# Altium PCB licheepi_nano_pcb.PcbDoc
Units mil, origin at the board's own origin, x right, y up, seen from the top; angles counter-clockwise.
Board outline 1096.8 x 1363.5 mil, 4 copper layers (Top Layer, Layer 1, Layer 2, Bottom Layer), stack 23.756 mil thick; 76 components, 94 nets, 415 pads, 227 vias.
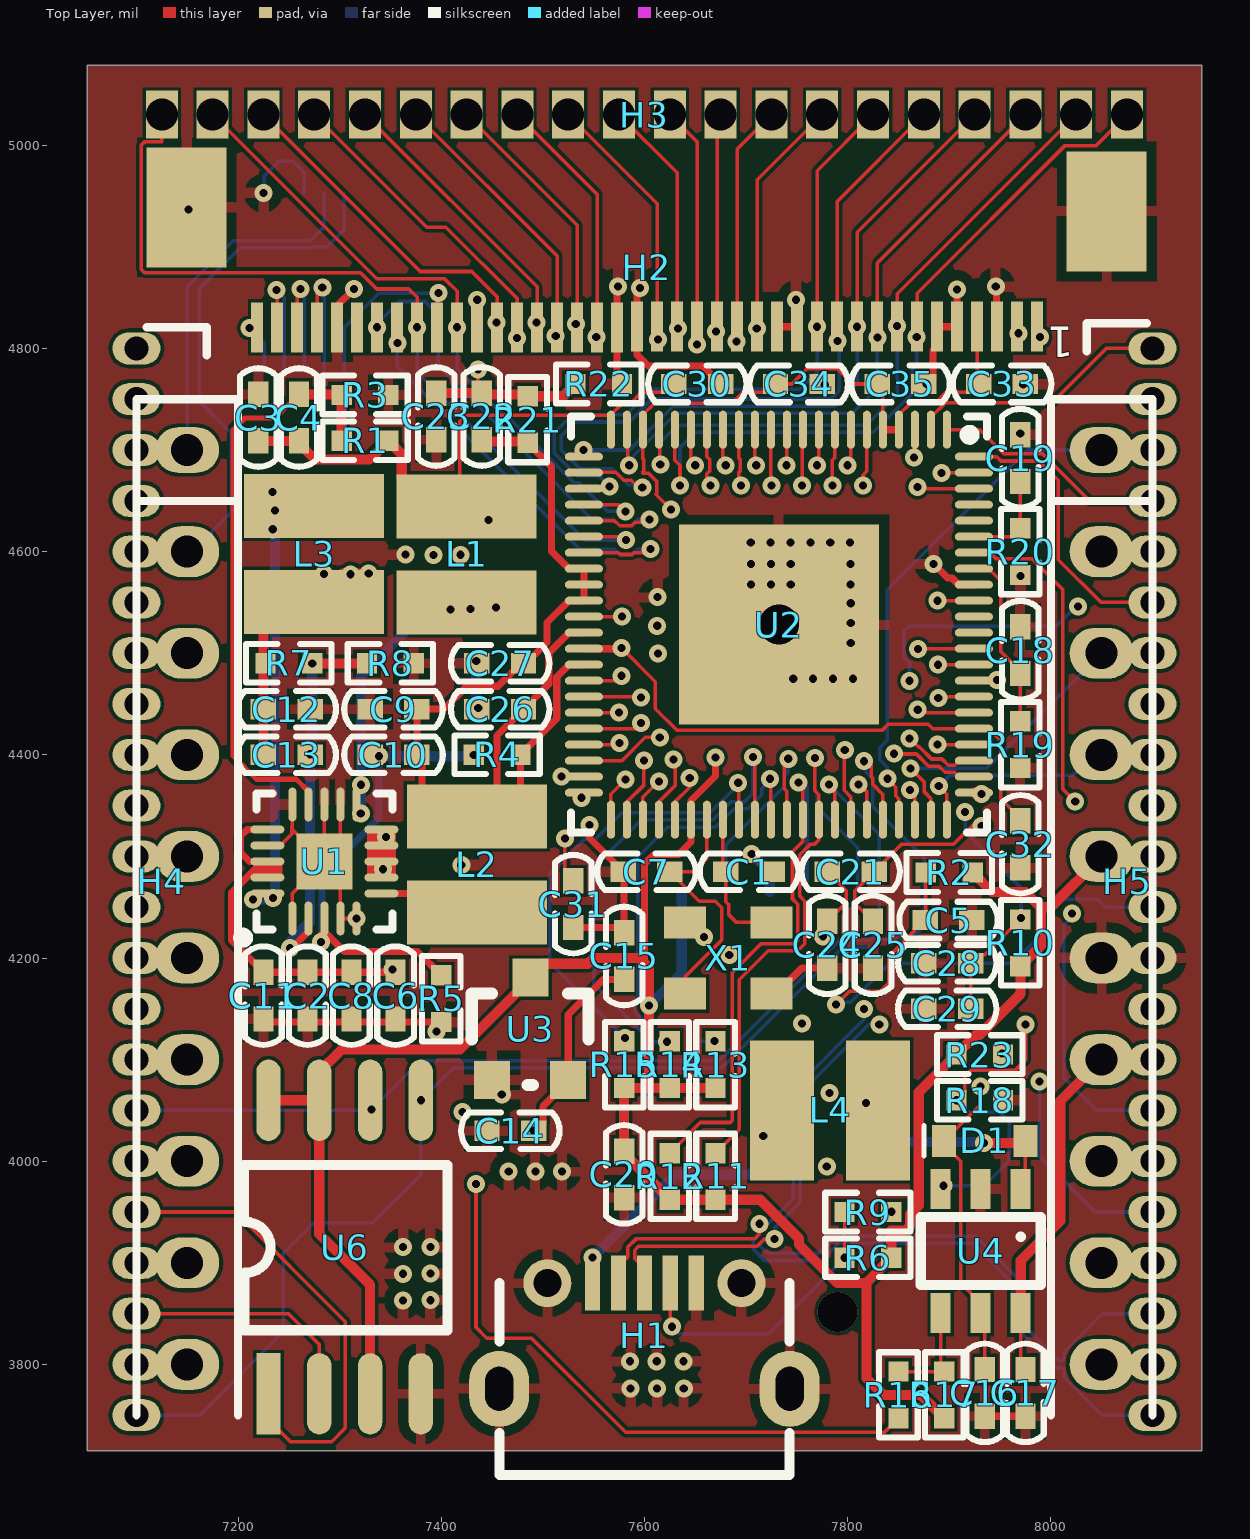
[diagram p0: Top Layer view]
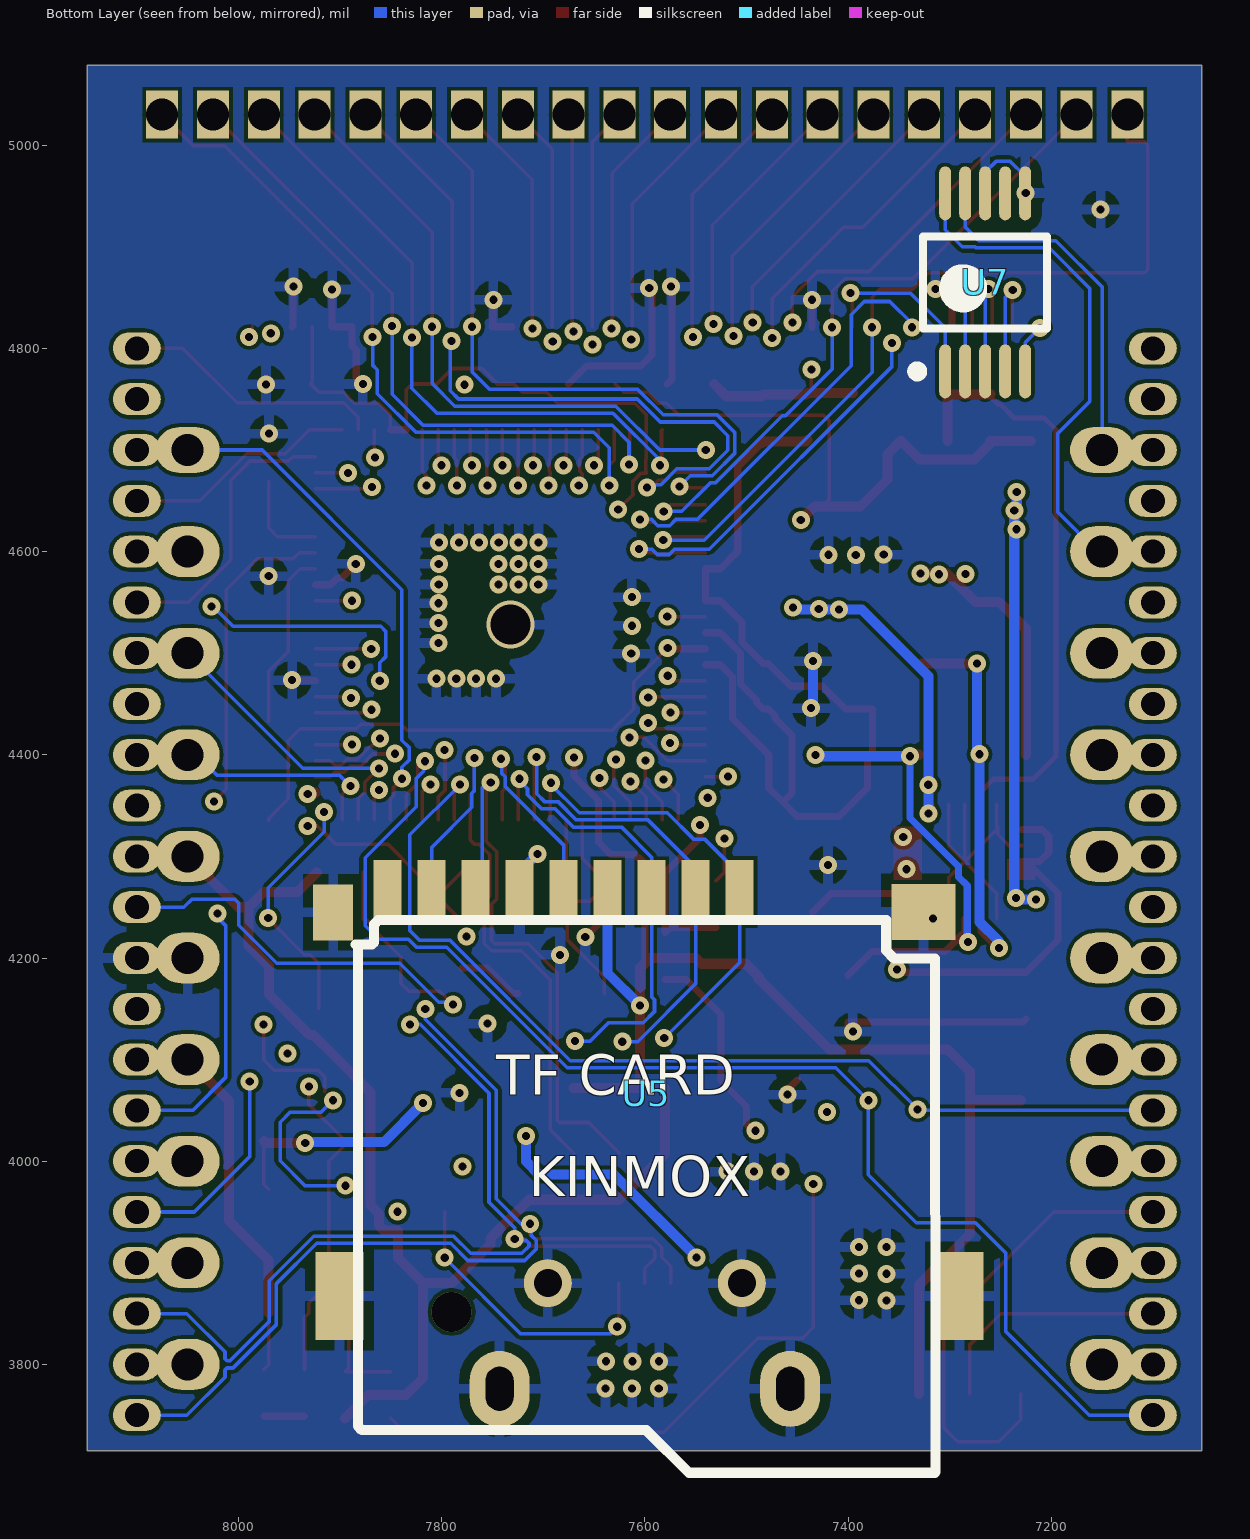
[diagram p1: Bottom Layer view, seen from below]
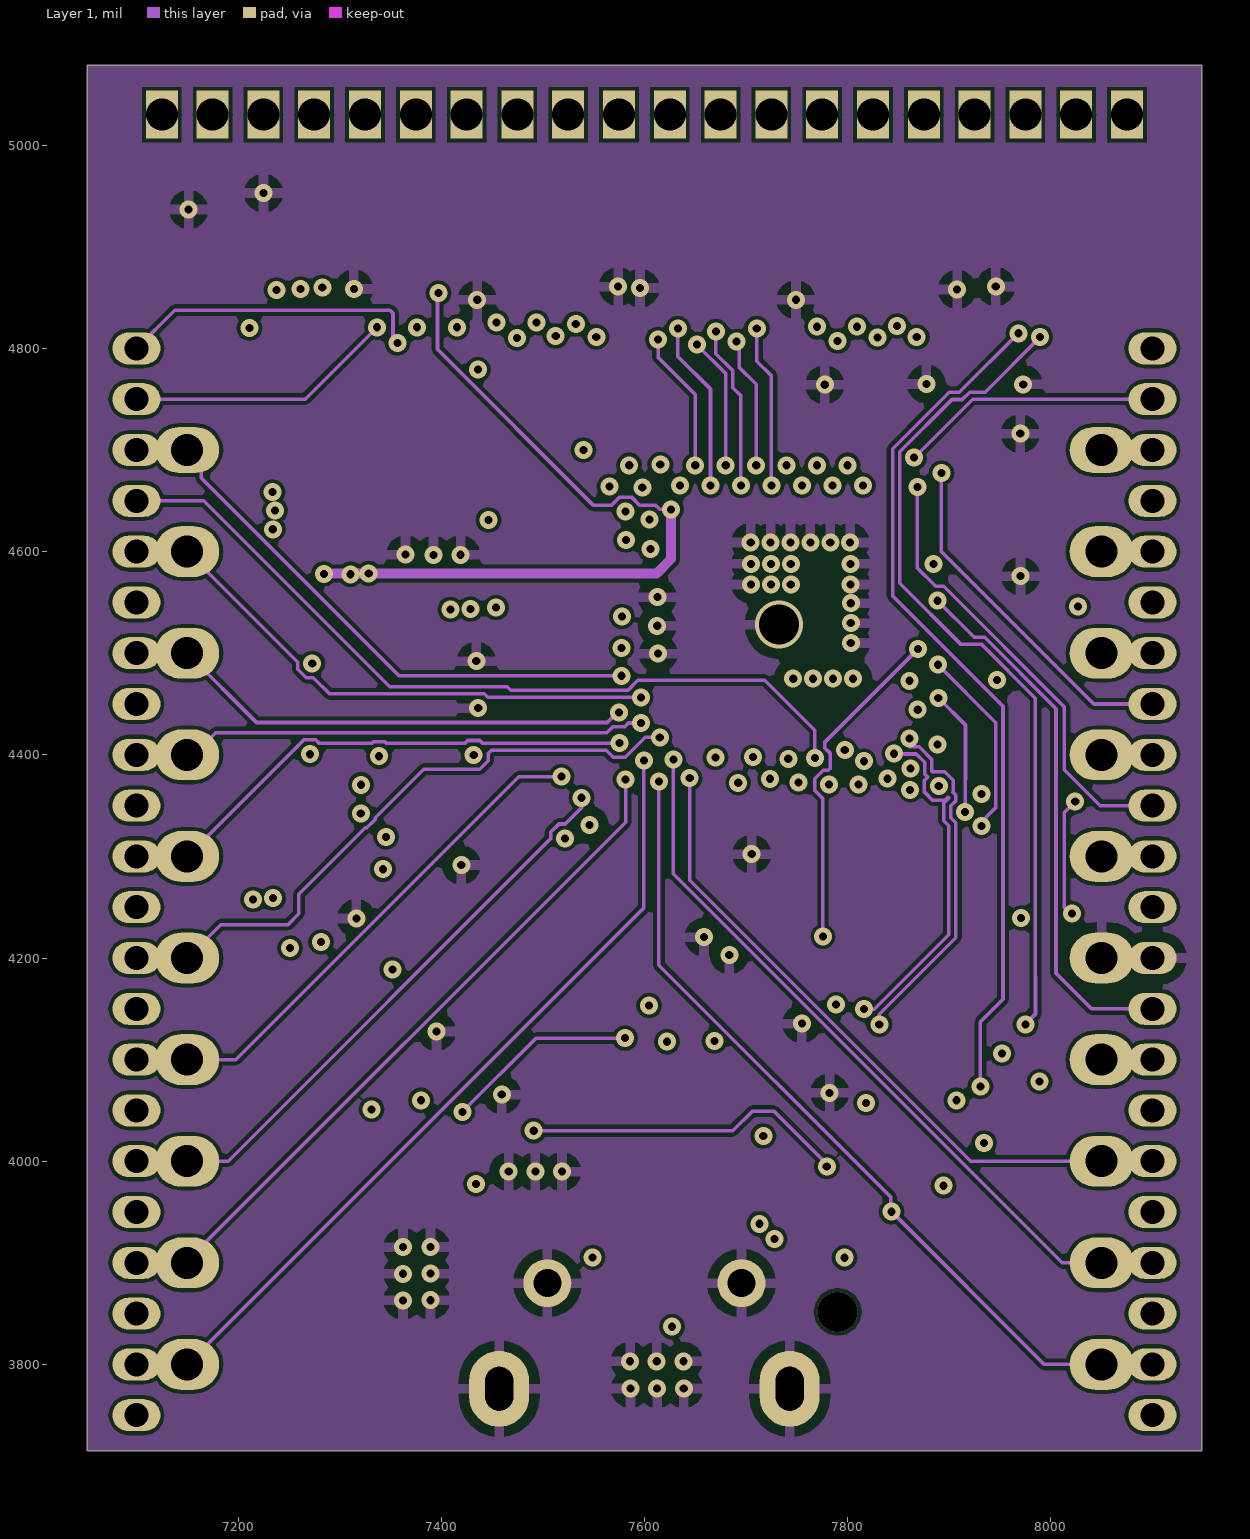
[diagram p2: Layer 1]
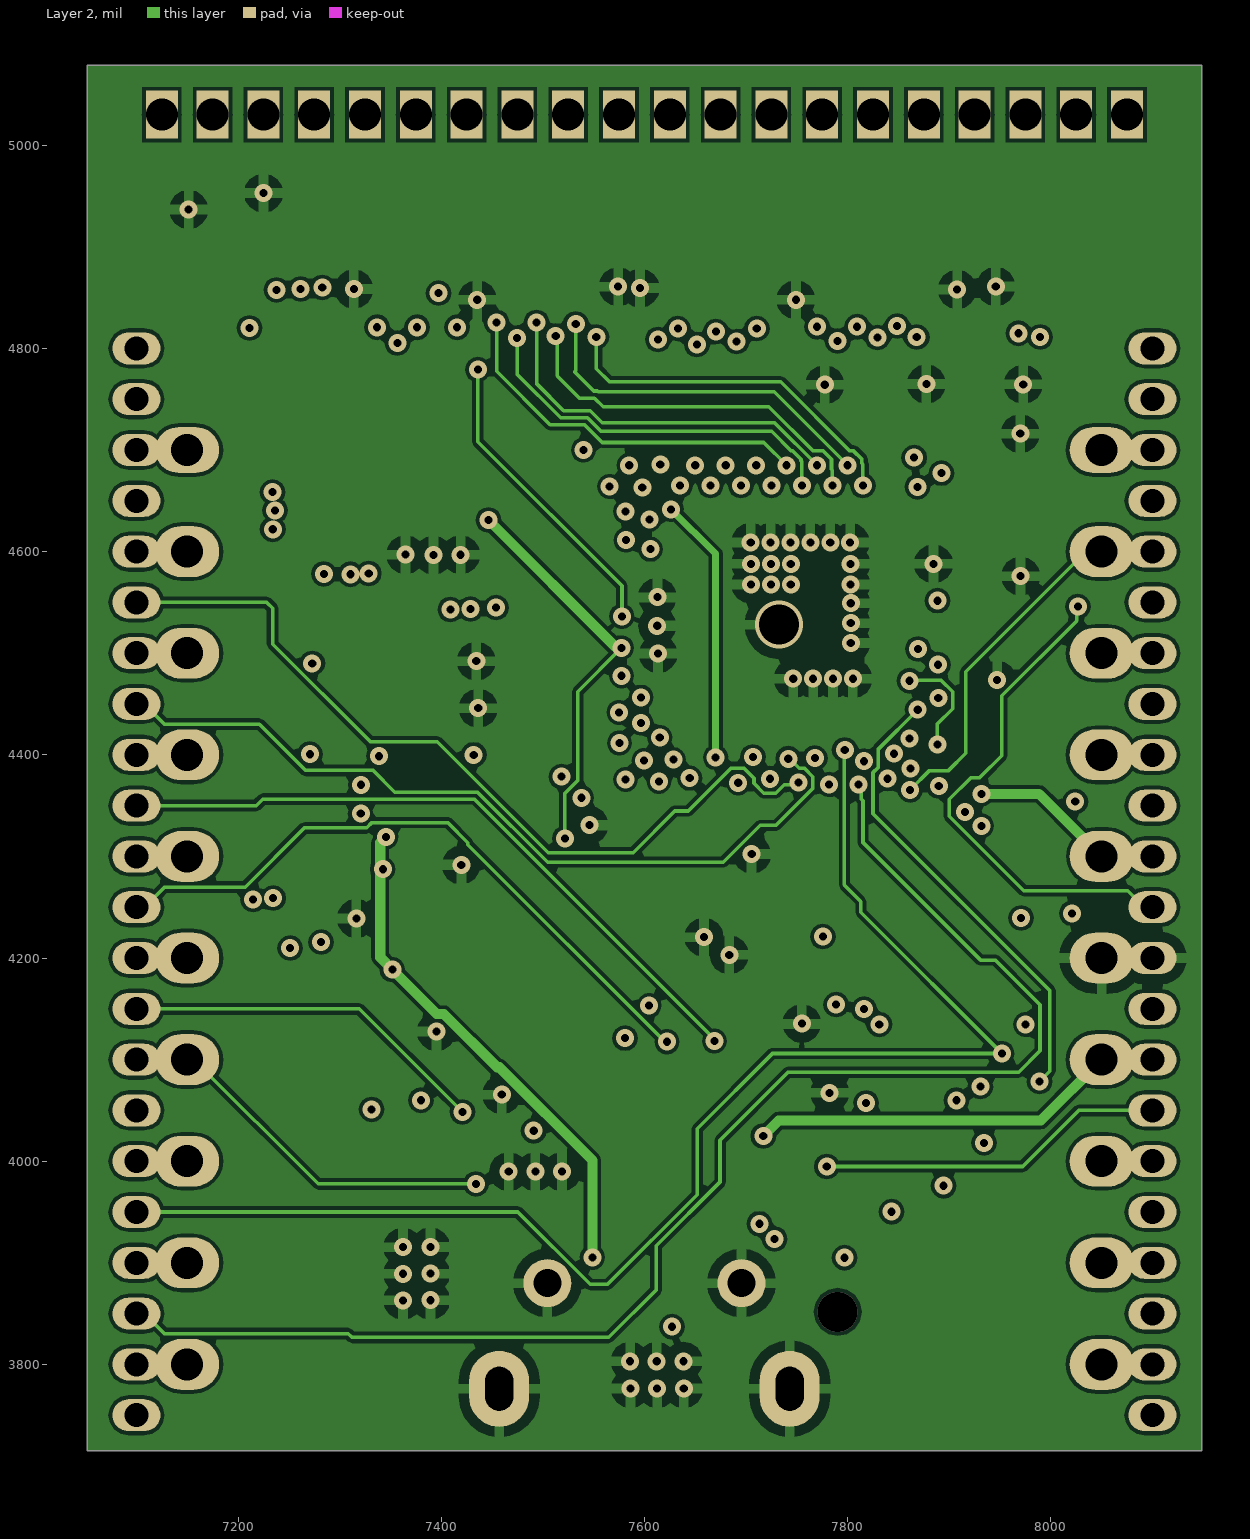
[diagram p3: Layer 2]
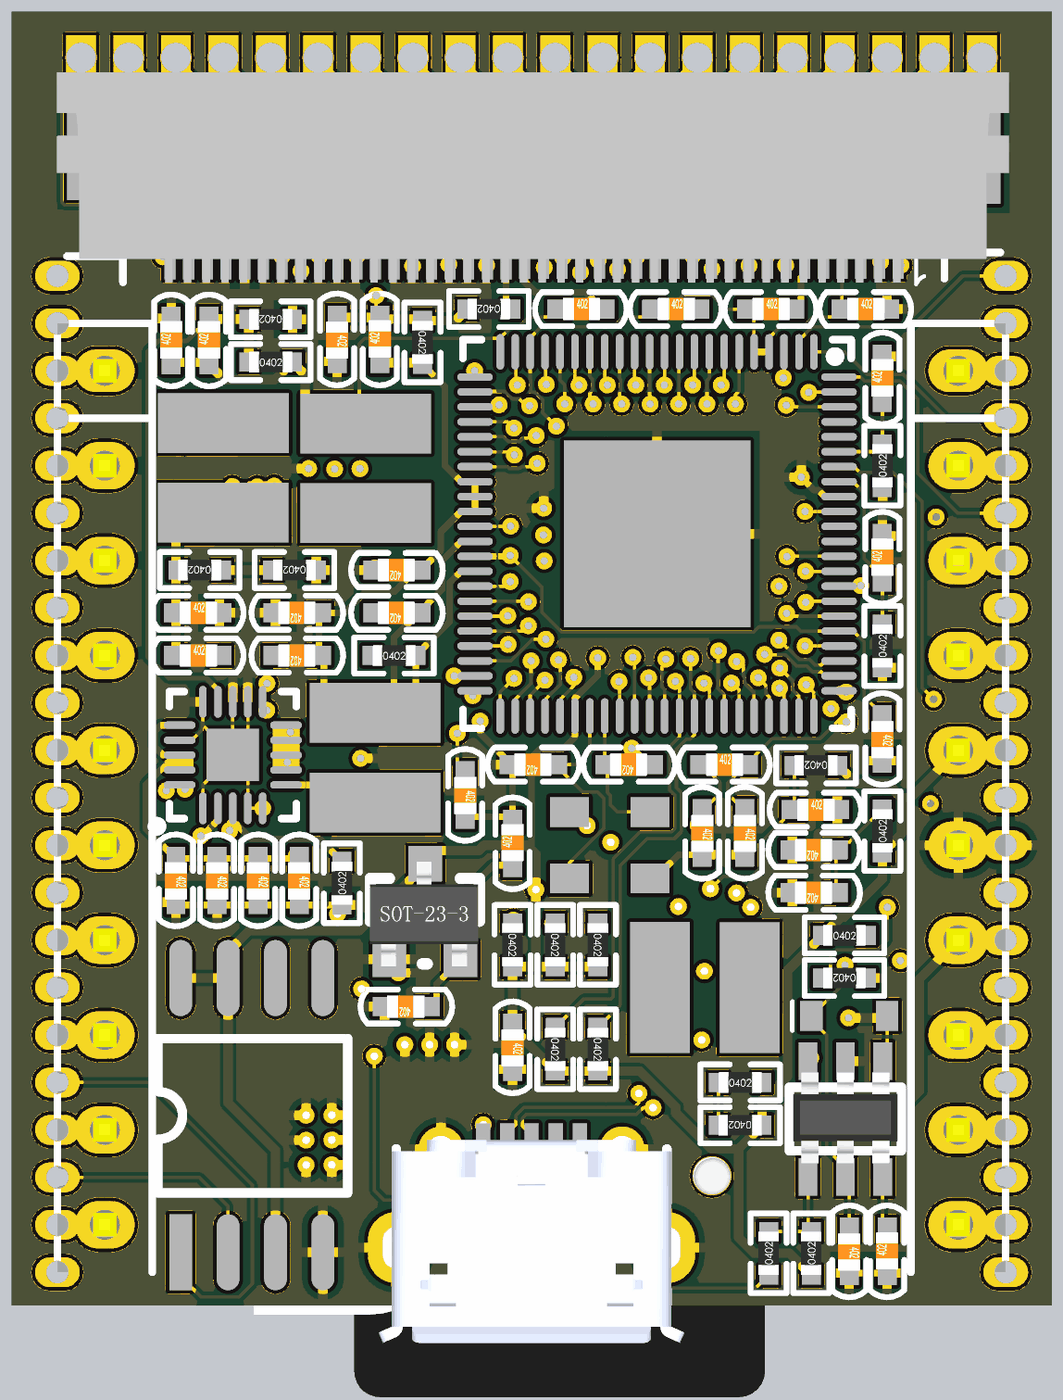
[diagram p4: 3D render of the assembled board from above, using the file's embedded part models]

## Layer stack, top to bottom
Top Solder: solder mask 0.4, Solder Resist, Dk 3.5
Top Layer: signal copper 1.4
Dielectric 2: prepreg 2.8, PP-006, Dk 4.1
Layer 1: signal copper 1.3779
Dielectric 1: dielectric 12.6, FR-4, Dk 4.8
Layer 2: signal copper 1.3779
Dielectric 3: prepreg 2.8, PP-006, Dk 4.1
Bottom Layer: signal copper 1.4
Bottom Solder: solder mask 0.4, Solder Resist, Dk 3.5

## Board outline
7051.8,3715 8148.6,3715 8148.6,5078.5 7051.8,5078.5

## Design rules (kind name [scope] priority, off if disabled: settings)
Clearance [All] p1: gap=3.5 ignorepadtopadclearanceinfootprint=FALSE except(0: Arc-Hole Track-Hole SMDPad-Hole THPad-Hole Via-Hole Fill-Hole Poly-Hole Region-Hole Text-Hole)
DiffPairsRouting [All] p1: maxlimit=10 minlimit=3.5 mostfreqgap=3.5 toplayer_maxgap=3.5 toplayer_minwidth=3.5 toplayer_maxwidth=3.5 toplayer_prefwidth=3.5 midlayer1_maxgap=3.5 midlayer1_minwidth=3.5 midlayer1_maxwidth=3.5 midlayer1_prefwidth=3.5 midlayer2_minwidth=3.5 midlayer2_maxwidth=3.5 midlayer2_prefwidth=3.5 bottomlayer_minwidth=3.5 bottomlayer_maxwidth=3.5 bottomlayer_prefwidth=3.5 maxuncoupledlength=500
MinimumSolderMaskSliver [All] p1 off: minsoldermaskwidth=10
PolygonConnect [All] p1: connectstyle=Relief reliefconductorwidth=10 reliefentries=4 polygonreliefangle="90 Angle" airgapwidth=10
RoomDefinition licheepi_nano_pcb [InComponentClass('licheepi_nano_pcb')] p1 off: confinementstyle=ConfineIn formatcopy=TRUE lockcomponents=FALSE outline 7465,3445 23305,3445 23305,2265 7465,2265
RoutingVias [All] p1: holewidth=7.99 width=17.72 viastyle="Through Hole" minholewidth=7.99 minwidth=17.72 maxholewidth=7.99 maxwidth=17.72
SilkToSilkClearance [All] p1 off: silktosilkclearance=10
SilkToSolderMaskClearance [IsPad] p1 off: minsilkscreentomaskgap=10 clearancetoexposedcopper=TRUE
SolderMaskExpansion [All] p1: expansion=4
Width [All] p1: maxlimit=10 minlimit=3.5 preferedwidth=3.5
26 further rules are at their usual default settings.

## Components (designator, comment, footprint, x,y, rotation, side; value= is the part's Value field where it differs from the comment)
C1 "18pF" 0402C 7726,4285 r180 top
C2 "10uF" 0402C 7268.33,4186 r270 top
C3 "10uF" 0402C 7220,4709 r90 top
C4 "18pF" 0402C 7260,4709 r90 top
C5 "0.1uF" 0402C 7876.32,4237.37 r0 top
C6 "10uF" 0402C 7355,4186 r270 top
C7 "18pF" 0402C 7625,4285 r180 top
C8 "10uF" 0402C 7311.67,4186 r270 top
C9 "10uF" 0402C 7376,4445 r180 top
C10 "18pF" 0402C 7376,4400 r180 top
C11 "1uF" 0402C 7225,4186 r270 top
C12 "10uF" 0402C 7225,4445 r0 top
C13 "18pF" 0402C 7225,4400 r0 top
C14 "0.1uF" 0402C 7491,4030 r180 top
C15 "10uF" 0402C 7580,4179 r90 top
C16 "0.1uF_25V" 0402C 7935,3795 r270 top
C17 "10uF" 0402C 7975,3749 r90 top
C18 "1uF" 0402C 7970,4480 r90 top
C19 "1uF" 0402C 7970,4669 r90 top
C20 "0.1uF" 0402C 7580,4010 r270 top
C21 "10uF" 0402C 7780,4285 r0 top
C22 "0.1uF" 0402C 7440,4710 r90 top
C23 "0.1uF" 0402C 7395,4756 r270 top
C24 "10uF" 0402C 7780,4236 r270 top
C25 "10uF" 0402C 7825,4236 r270 top
C26 "1uF" 0402C 7481,4445 r180 top
C27 "0.1uF" 0402C 7481,4490 r180 top
C28 "10uF" 0402C 7921,4195 r180 top
C29 "0.1uF" 0402C 7921,4150 r180 top
C30 "0.1uF" 0402C 7629,4765 r0 top
C31 "0.1uF" 0402C 7530,4276 r270 top
C32 "0.1uF" 0402C 7970,4335 r270 top
C33 "10uF" 0402C 7929,4765 r0 top
C34 "0.1uF" 0402C 7729,4765 r0 top
C35 "0.1uF" 0402C 7829,4765 r0 top
D1 "1N5819" SOD123 7975,4020 r180 top
H1 "USB_MICRO" USB_MICRO_insert 7600,3880 r180 top
H2 "FPC-40-LCD" FPC-40P-0.5 8086.5,4911.38 r180 top
H3 "HEADER_TOP" SIP20_1.27_half 8075,5030 r180 top
H4 "HEADER_LEFT" SIP22_10_1.27-mir 7100,4750 r270 top
H5 "HEADER_RIGHT" SIP22_10_1.27 8100,4750 r270 top
L1 "2.2uH" CD32 7425,4615 r180 top
L2 "2.2uH" CD32 7435,4310 r180 top
L3 "2.2uH" CD32 7275,4580 r0 top
L4 "2.2uH" CD32 7765,4050 r270 top
R1 "150K" 0402R 7325,4709.17 r0 top
R2 "47K" 0402R 7900,4284.18 r180 top
R3 "150K" 0402R 7325,4754.17 r180 top
R4 "470K" 0402R 7455,4400 r0 top
R5 "160K" 0402R 7400,4160 r90 top
R6 "47K" 0402R 7820,3905 r180 top
R7 "680K" 0402R 7250,4490 r180 top
R8 "150K" 0402R 7350,4490 r180 top
R9 "0R" 0402R 7820,3950 r0 top
R10 "0R" 0402R 7970,4215 r90 top
R11 "47K" 0402R 7670,3985 r270 top
R12 "47K" 0402R 7625,3985 r270 top
R13 "47K" 0402R 7670,4095 r270 top
R14 "47K" 0402R 7625,4095 r270 top
R15 "47K" 0402R 7580,4095 r270 top
R16 "0R" 0402R 7850,3770 r90 top
R17 "10K" 0402R 7895,3770 r90 top
R18 "5R1" 0402R 7930,4060 r180 top
R19 "200K" 0402R 7970,4410 r90 top
R20 "200K" 0402R 7970,4600 r90 top
R21 "2K" 0402R 7485,4730 r270 top
R22 "2K" 0402R 7555,4765 r180 top
R23 "10K" 0402R 7930,4105 r0 top
U1 "EA3036" QFN20-3x3 7285,4295 r90 top
U2 "F1C100S" QFN88-0.4 7732.36,4528.07 r270 top
U3 "XC6206" SOT-23 7450,4080 r0 top
U4 "PT4103" sot23_6 7990,3945 r180 top
U5 "TF_Slot" TF_self-eject 7506.77,4265 r180 bottom
U6 "FLASH_W25Q128" SO-8M 7230,3759.21 r90 top
U7 "NS2009" MSOP10 7265,4865 r90 bottom
X1 "XTAL_24M_3225" SMD_3225 7640,4165 r0 top

## Footprints (in the part's own frame and the unit in brackets; to place one, negate y for a bottom-side part, rotate by r counter-clockwise, add the part's x,y. Pads: shape width x height; smd on the part's side, far side on the other; paste and mask are expansions set on the pad)
0402C [mil]
  rect 25x20 smd: 1(0,0) 2(46,0)
  silkscreen extent -25,-18 71,18, body extent 4,-12 43,12, height 8
0402R [mil]
  rect 20x20 smd: 1(-23,0) 2(23,0)
  silkscreen extent -42,-19 42,19, body extent -23,-11 23,11, height 16
CD32 [mm]
  rect 3.5x1.6 smd: 1(0,1.651) 2(-0.002,-0.748)
FPC-40P-0.5 [mm]
  rect 0.3x1.25 smd: 1(2.54,2.286) 2(3.04,2.286) 3(3.54,2.286) 4(4.04,2.286) 5(4.54,2.286) 6(5.04,2.286) 7(5.54,2.286) 8(6.04,2.286) 9(6.54,2.286) 10(7.04,2.286) 11(7.54,2.286) 12(8.04,2.286) 13(8.54,2.286) 14(9.04,2.286) 15(9.54,2.286) 16(10.04,2.286) 17(10.54,2.286) 18(11.04,2.286) 19(11.54,2.286) 20(12.04,2.286) 21(12.54,2.286) 22(13.04,2.3) 23(13.54,2.3) 24(14.04,2.3) 25(14.54,2.3) 26(15.04,2.3) 27(15.54,2.3) 28(16.04,2.3) 29(16.54,2.3) 30(17.04,2.3) 31(17.54,2.3) 32(18.04,2.3) 33(18.54,2.3) 34(19.04,2.3) 35(19.54,2.3) 36(20.04,2.3) 37(20.54,2.3) 38(21.04,2.3) 39(21.54,2.3) 40(22.04,2.3)
  rect 2x3 smd: 41(0.8,-0.6) 42(23.8,-0.7)
  silkscreen extent -0.2,2.2 24.8,3, body extent -0.43,-2.63 25.07,3.01, height 2.21
MSOP10 [mm] "TSSOP, 10-Leads, Body 3.00x3.00mm, Pitch 0.50mm, IPC Medium Density"
  oval 1.35x0.3 smd: 1(-2.225,1) 2(-2.225,0.5) 3(-2.225,0) 4(-2.225,-0.5) 5(-2.225,-1) 6(2.225,-1) 7(2.225,-0.5) 8(2.225,0) 9(2.225,0.5) 10(2.225,1)
  silkscreen extent -2.35,-1.55 1.15,1.83, body extent -1.55,-1.55 1.55,1.55, height 1.12
QFN20-3x3 [mm] "QFN, 20-Leads, Body 3.00x3.00mm, Pitch 0.40mm"
  oval 0.85x0.2 smd: 1(-1.425,0.8) 2(-1.425,0.4) 3(-1.425,0) 4(-1.425,-0.4) 5(-1.425,-0.8) 11(1.425,-0.8) 12(1.425,-0.4) 13(1.425,0) 14(1.425,0.4) 15(1.425,0.8)
  oval 0.2x0.85 smd: 6(-0.8,-1.425) 7(-0.4,-1.425) 8(0,-1.425) 9(0.4,-1.425) 10(0.8,-1.425) 16(0.8,1.425) 17(0.4,1.425) 18(0,1.425) 19(-0.4,1.425) 20(-0.8,1.425)
  rect 1.4x1.4 smd: 21(0,0)
  silkscreen extent -2.03,-1.7 1.7,2.16, body extent -1.55,-1.55 1.55,1.55, height 0.8
QFN88-0.4 [mm] "QFN88-0.4"
  oval 0.95x0.2 smd: 1(-4.875,4.2) 2(-4.875,3.8) 3(-4.875,3.4) 4(-4.875,3) 5(-4.875,2.6) 6(-4.875,2.2) 7(-4.875,1.8) 8(-4.875,1.4) 9(-4.875,1) 10(-4.875,0.6) 11(-4.875,0.2) 12(-4.875,-0.2) 13(-4.875,-0.6) 14(-4.875,-1) 15(-4.875,-1.4) 16(-4.875,-1.8) 17(-4.875,-2.2) 18(-4.875,-2.6) 19(-4.875,-3) 20(-4.875,-3.4) 21(-4.875,-3.8) 22(-4.875,-4.2) 45(4.875,-4.2) 46(4.875,-3.8) 47(4.875,-3.4) 48(4.875,-3) 49(4.875,-2.6) 50(4.875,-2.2) 51(4.875,-1.8) 52(4.875,-1.4) 53(4.875,-1) 54(4.875,-0.6) 55(4.875,-0.2) 56(4.875,0.2) 57(4.875,0.6) 58(4.875,1) 59(4.875,1.4) 60(4.875,1.8) 61(4.875,2.2) 62(4.875,2.6) 63(4.875,3) 64(4.875,3.4) 65(4.875,3.8) 66(4.875,4.2)
  oval 0.2x0.95 smd: 23(-4.2,-4.875) 24(-3.8,-4.875) 25(-3.4,-4.875) 26(-3,-4.875) 27(-2.6,-4.875) 28(-2.2,-4.875) 29(-1.8,-4.875) 30(-1.4,-4.875) 31(-1,-4.875) 32(-0.6,-4.875) 33(-0.2,-4.875) 34(0.2,-4.875) 35(0.6,-4.875) 36(1,-4.875) 37(1.4,-4.875) 38(1.8,-4.875) 39(2.2,-4.875) 40(2.6,-4.875) 41(3,-4.875) 42(3.4,-4.875) 43(3.8,-4.875) 44(4.2,-4.875) 67(4.2,4.875) 68(3.8,4.875) 69(3.4,4.875) 70(3,4.875) 71(2.6,4.875) 72(2.2,4.875) 73(1.8,4.875) 74(1.4,4.875) 75(1,4.875) 76(0.6,4.875) 77(0.2,4.875) 78(-0.2,4.875) 79(-0.6,4.875) 80(-1,4.875) 81(-1.4,4.875) 82(-1.8,4.875) 83(-2.2,4.875) 84(-2.6,4.875) 85(-3,4.875) 86(-3.4,4.875) 87(-3.8,4.875) 88(-4.2,4.875)
  rect 5x5 smd: 89(0,0)
  silkscreen extent -5.2,-5.2 5.2,5.2, body extent -5.05,-5.05 5.05,5.05, height 0.9
SIP20_1.27_half [mm]
  rect 0.8x1.2 hole 0.8: 1(0,0) 2(1.27,0) 3(2.54,0) 4(3.81,0) 5(5.08,0) 6(6.35,0) 7(7.62,0) 8(8.89,0) 9(10.16,0) 10(11.43,0) 11(12.7,0) 12(13.97,0) 13(15.24,0) 14(16.51,0) 15(17.78,0) 16(19.05,0) 17(20.32,0) 18(21.59,0) 19(22.86,0) 20(24.13,0)
SIP22_10_1.27 [mm]
  oval 0.8x1.2 hole 0.6: 1(-1.27,0) 2(0,0) 3(1.27,0) 4(2.54,0) 5(3.81,0) 6(5.08,0) 7(6.35,0) 8(7.62,0) 9(8.89,0) 10(10.16,0) 11(11.43,0) 12(12.7,0) 13(13.97,0) 14(15.24,0) 15(16.51,0) 16(17.78,0) 17(19.05,0) 18(20.32,0) 19(21.59,0) 20(22.86,0) 21(24.13,0) 22(25.4,0)
  oval 1.143x1.6 hole 0.8: 3(1.27,-1.27)
  oval 1.27x1.6 hole 0.8: 5(3.81,-1.27) 7(6.35,-1.27) 9(8.89,-1.27) 11(11.43,-1.27) 13(13.97,-1.27) 15(16.51,-1.27) 17(19.05,-1.27) 19(21.59,-1.27) 21(24.13,-1.27)
  silkscreen extent 0,-2.54 25.4,0, body extent 0,-2.54 25.4,0, height 8.89
SIP22_10_1.27-mir [mm]
  oval 0.8x1.2 hole 0.6: 1(-1.27,0) 2(0,0) 3(1.27,0) 4(2.54,0) 5(3.81,0) 6(5.08,0) 7(6.35,0) 8(7.62,0) 9(8.89,0) 10(10.16,0) 11(11.43,0) 12(12.7,0) 13(13.97,0) 14(15.24,0) 15(16.51,0) 16(17.78,0) 17(19.05,0) 18(20.32,0) 19(21.59,0) 20(22.86,0) 21(24.13,0) 22(25.4,0)
  oval 1.143x1.6 hole 0.8: 3(1.27,1.27)
  oval 1.27x1.6 hole 0.8: 5(3.81,1.27) 7(6.35,1.27) 9(8.89,1.27) 11(11.43,1.27) 13(13.97,1.27) 15(16.51,1.27) 17(19.05,1.27) 19(21.59,1.27) 21(24.13,1.27)
  silkscreen extent 0,0 25.4,2.54, body extent 0,0 25.4,2.54, height 8.89
SMD_3225 [mm]
  rect 1.05x0.8 smd: 1(0,0) 2(2.159,0) 3(2.159,1.778) 4(0,1.778)
SO-8M [mil]
  rect 80x24 smd: 1(11.81,0)
  oval 80x24 smd: 2(11.81,-50) 3(11.81,-100) 4(11.81,-150) 5(300.79,-150) 6(300.79,-100) 7(300.79,-50) 8(300.79,0)
  silkscreen extent 74,-176 237,24
SOD123 [mm]
  rect 0.6x0.8 smd: 1(0,0) 2(2.032,0)
  silkscreen extent 2.54,-0.38 2.54,0.38
sot23_6 [mm]
  rect 0.5x1 smd: 1(0.5,-0.7) 2(1.5,-0.7) 3(2.5,-0.7) 4(2.5,2.4) 5(1.5,2.4) 6(0.5,2.4)
  silkscreen extent 0,0 3,1.7, body extent 0.1,-0.39 2.9,2.03, height 1.08
SOT-23 [mm]
  rect 0.9x0.95 smd: 1(0,0) 2(1.905,0) 3(0.962,2.555)
  silkscreen extent -0.51,-0.13 2.41,2.16, body extent -0.52,-0.2 2.38,2.6, height 1.2
TF_self-eject [mm]
  rect 0.7x1.6 smd: 1(0,0) 2(-1.1,0) 3(-2.2,0) 4(-3.3,0) 5(-4.4,0) 6(-5.5,0) 7(-6.6,0) 8(-7.7,0) 9(-8.8,0)
  rect 1x1.4 smd: 10(-10.16,-0.508)
  rect 1.6x1.4 smd: 11(4.6,-0.5)
  rect 1.2x2.2 smd: 12(5.5,-10.1) 13(-10,-10.1)
  silkscreen extent -9.59,-14.52 4.9,-0.7, body extent -10.32,-16.42 5.78,0.78, height 2.2
USB_MICRO_insert [mil]
  rect 15x54 smd: 1(51,0) 2(25.5,0) 3(0,0) 4(-25.5,0) 5(-51,0)
  oval 59.06x74.8 hole 27.56 slot 43.31 at 90 deg: 6(-143,104) 7(143,104)
  round 47.24 hole 27.5: 8(95.5,0) 9(-95.5,0)
  silkscreen extent -143,0 143,189, body extent -161,-9 161,204, height 105

## Part data
C1 C2 C3 C4 C5 C6 C7 C8 C9 C10 C11 C12 C13 C14 C15 C16 C17 C18 C19 C20 C21 C22 C23 C24 C25 C26 C27 C28 C29 C30 C31 C32 C33 C34 C35: library part CAP, "SMD-CAP"
L1 L2 L3 L4: library part L1, "电感"
R1 R2 R3 R4 R5 R6 R7 R8 R9 R10 R11 R12 R13 R14 R15 R16 R17 R18 R19 R20 R21 R22 R23: library part R

## Via types
v1: diameter 17.72, hole 7.99, Top Layer to Bottom Layer, 225 vias
v2: diameter 39.37, hole 39.37, Top Layer to Bottom Layer, 1 vias
v3: diameter 47.24, hole 39.37, Top Layer to Bottom Layer, tented both sides, 1 vias

## Nets (pads, with @x,y where several pads share a name; then routed paths per layer and width w, separated by ;. In a path a pad name is that pad's centre, name@x,y a point inside that pad or via, vN(x,y) a via of type N, cw(c..) or ccw(c..) an arc to the next point about the centre after c; other vN are vias at no path point)
1V1: C3.1 C4.1 C30.1 C31.1 C32.1 L1.2 R1.2 U2.22 U2.35 U2.71 | length 1597
  Top Layer w3.5: L1.2 7418.3,4651.23 7418.3,4728.4 7424.1,4734.2 7566.44,4734.2 7578.42,4746.18 7586.6,4746.18 7597.17,4756.75 7620.75,4756.75 C30.1 ; v1(7521.7,4317.8) 7521.75,4317.75 7521.75,4284.25 C31.1 ; v1@7576.65,4504.45 7578.35,4504.45 7610.81,4471.99 7610.81,4445.35 7631.76,4424.39 7834.29,4424.39 7840.11,4430.21 7879.4,4430.21 7883.9,4425.71 U2.71 7939.06,4425.71 7950.82,4413.94 7950.82,4356.68 7970,4337.5 C32.1
  Top Layer w7: U2.35 v1@7576.65,4504.45
  Top Layer w10: C3.1 C4.1 7260,4706.5 7275.83,4690.67 7329.5,4690.67 R1.2 7361.18,4695.98 7361.18,4670.94 7387.68,4644.45 L1.2 7433.15,4644.45 v1(7446.5,4631.1)
  Layer 2 w3.5: v1(7521.7,4317.8) 7521.7,4361.95 7534.4,4374.65 7534.4,4462.2 v1(7577.5,4505.3)
  Layer 2 w10: v1(7446.5,4631.1) 7570.82,4506.78 7576.02,4506.78 v1(7577.5,4505.3)
2V5: C9.1 C10.1 C22.1 C26.1 C27.1 L2.2 R4.2 R21.2 U2.30 U2.31 U2.32 U2.34 U2.36 | length 1026.2
  Top Layer w7: R21.2 7508.5,4683.5 7508.5,4600.36 7525.67,4583.19 U2.30 U2.31 U2.32 7525.67,4551.69 7504.2,4530.22 7504.2,4510.7 7483.5,4490 C27.1 7478.5,4490 7456,4467.5 7425.1,4467.5 7402.6,4445 C9.1 C10.1 7381.03,4394.97 7381.03,4367.44 7409.02,4339.45 L2.2 7450,4339.45 L2.2@7464,4353.45 ; U2.36 7525.67,4488.7 7513.7,4476.73 7513.7,4435.7 R4.2 7478,4367.44 L2.2@7464,4353.45 ; U2.34 7525.67,4520.2 7505.8,4500.33 7505.8,4469.8 7490,4454 7490,4451.5 7483.5,4445 C26.1 7478.5,4445 7472,4438.5 7472,4436 7455,4419 7455,4362.45 L2.2@7464,4353.45
  Top Layer w10: C22.1 7441.5,4708.5 7483.5,4708.5 R21.2
3V0: C14.1 C15.1 H5.16 U2.82 U3.2 | length 1563.6
  Top Layer w3.5: U2.82 7940.24,4598.94 7946.03,4593.15 7981.27,4593.15 8011.9,4562.52 8011.9,4366 v1(8024,4353.9)
  Top Layer w7: v1(7491,4030) 7493.5,4030 7500,4036.5 7500,4054.02 7525,4079.02 U3.2 7525,4144.5 7559.5,4179 C15.1
  Layer 1 w3.5: v1(7491,4030) 7687,4030 7706.3,4049.3 7727.5,4049.3 7779.5,3997.3 v1(7779.5,3994.8) ; v1(8020.7,4243.9) 8019.1,4243.9 8013.25,4249.75 8013.25,4343.15 v1(8024,4353.9)
  Layer 2 w3.5: v1(7779.5,3994.8) 7972.2,3994.8 8027.4,4050 H5.16
  Bottom Layer w3.5: v1(8020.7,4243.9) 8020.7,4240.05 8012.7,4232.05 8012.7,4082.4 8045.1,4050 H5.16
3V3: C12.1 C13.1 C20.1 C33.1 C34.1 C35.1 H2.4 H2.31 H5.11 L3.2 R2.1 R6.1 R7.2 R10.1 R11.2 R12.2 R13.2 R14.2 R15.2 R17.1 R23.1 U2.4 U2.5 U2.20 U2.50 U2.67 U3.3 U5.4 U6.3 U6.7 U6.8 U7.1 | length 4687.9
  Top Layer w3.5: H2.31 7395.94,4852.94 v1(7397.4,4854.4) ; v1(7626.2,4641.6) 7611.23,4656.57 7612.01,4657.36 7612.01,4669.04 7603.74,4677.31 7598.5,4677.31 7598.5,4678.55 7599.11,4679.16 7599.11,4690.84 7598.5,4691.45 U2.20 7598.5,4734.76 7609.92,4746.18 7686.1,4746.18 7696.67,4756.75 7720.75,4756.75 C34.1 7745.08,4765 7760.33,4780.25 7789.67,4780.25 7804.92,4765 C35.1 7834.72,4759.28 U2.5 ; U2.4 7850.47,4734.76 7861.88,4746.18 7886.1,4746.18 7896.67,4756.75 7920.75,4756.75 C33.1 7927.44,4766.56 H2.4
  Top Layer w7: 7600,4195 7600,4200 7600,4292.8 7605.9,4298.7 7606.3,4298.7 7609.6,4302 7633.5,4302 7645.75,4314.25 U2.50 7645.75,4355.15 7669.8,4379.2 v1(7669.8,4397.4) ; U2.5 U2.4
  Top Layer w10: C13.1 C12.1 7225,4524.06 7251.5,4550.55 L3.2 7302.87,4578.5 v1(7328.6,4578.5) ; U6.8 U6.7 ; U6.3 7330,3878.3 7280,3928.3 U6.7 ; R13.2 R14.2 7602.5,4072 ; R17.1 7872,3770 7835,3770 7818.42,3786.58 7818.42,3879.58 7818,3880 ; R2.1 7942.15,4265.04 7974.99,4265.04 7990,4250.02 ; U2.67 7930.58,4362.72 v1(7931.8,4361.5) ; H5.11@8050,4300 8000.02,4250.02 7990,4250.02 ; U6.7 7280,4088 7302,4110 7418.27,4110 7487.87,4179.61 U3.3 7487.87,4181.58 7500.59,4194.29 7544.2,4194.29 7549.91,4200 7595,4200 7600,4195 7604.6,4190.4 7604.6,4153.6 7605,4153.2 7604.6,4152.8 7604.6,4074.1 7602.5,4072 ; 7602.5,4072 R15.2 C20.1 7580,4007.5 7625.5,3962 R11.2 7714.05,3962 7752.01,3924.03 7752.01,3917.97 7789.98,3880 7818,3880 ; 7818,3880 R6.1 7843,3931.5 7856.52,3931.5 7861.5,3936.48 7861.5,3948.1 7870,3956.6 7870,4068 R23.1 7926.14,4124.14 7929.66,4124.14 7970,4164.48 R10.1 7990,4212 7990,4250.02
  Layer 1 w3.5: v1(7397.4,4854.4) 7396.3,4853.3 7396.3,4799.05 7549.9,4645.44 7567.29,4645.44 7575.56,4653.71 7587.24,4653.71 7595.51,4645.44 7595.87,4645.81 7610.74,4645.81 7614.95,4641.6 v1(7626.2,4641.6)
  Layer 1 w10: v1@7292.6,4578.5 7310.6,4578.5 v1(7328.6,4578.5) 7612,4578.5 7626.2,4592.7 v1(7626.2,4641.6)
  Layer 2 w7: v1(7626.2,4641.6) 7669.8,4598 v1(7669.8,4397.4)
  Layer 2 w10: v1(7931.8,4361.5) 7988.5,4361.5 H5.11@8050,4300
  Bottom Layer w3.5: U7.1 7304.37,4820.27 7338.5,4854.4 v1(7397.4,4854.4)
  Bottom Layer w10: v1(7604.6,4153.2) 7636.69,4185.29 U5.4
  other v1: 7284.5,4578.1 7310.6,4577.7
5V: C2.1 C6.1 C8.1 C11.1 C17.2 H1.1 H5.15 L4.2 U1.7 U1.8 U1.9 U1.10 U1.16 U1.18 U1.19 U4.6 | length 1784.3
  Top Layer w3.5: U4.6 7970.31,3799.69 C17.2
  Top Layer w7: U1.18 U1.18@7224.3,4295 ; U1.16 7209,4326.5 7202.5,4320 7202.5,4303.9 7211.4,4295 U1.18@7224.3,4295 ; C6.1 C8.1 C2.1 C11.1 7193.4,4217.6 7193.4,4264.1 U1.18@7224.3,4295
  Top Layer w10: U4.6 7970.31,3902.31 8009.2,3941.2 8009.2,4059.2 H5.15@8050,4100
  Layer 2 w10: v1(7345.7,4319.2) 7340,4313.5 7340,4200.6 v1(7351.85,4188.75) 7395.64,4144.96 7402.49,4144.96 7454.99,4092.46 7457.19,4092.46 7549,4000.65 v1(7549,3905.4) ; v1(7717,4024.85) 7732.19,4040.04 7990.04,4040.04 H5.15@8050,4100
  Bottom Layer w10: v1(7549,3905.4) 7630.4,3986.8 7703.8,3986.8 7717,4000 v1(7717,4024.85)
  other v1: 7342.5,4287.4
CLK_OUT: H4.5 U2.38 U7.10 | length 1061.6
  Top Layer w3.5: U2.38 7596.1,4457.2 v1(7596.7,4456.6)
  Layer 1 w3.5: H4.5@7150,4600 7258.89,4491.11 7258.89,4484.16 7267.16,4475.89 7274.11,4475.89 7289.99,4460.01 7442.24,4460.01 7445.65,4456.6 v1(7596.7,4456.6)
  Bottom Layer w3.5: H4.5@7150,4600 7154.8,4600 7193.4,4638.6 7193.4,4716.4 7162,4747.8 7162,4859 7202.1,4899.1 7274.1,4899.1 7275,4900 7287.6,4900 7304.37,4916.77 U7.10
CSI_D0: H4.21 U2.46 | length 845.6
  Top Layer w3.5: U2.46 7582.76,4353.53 7599.5,4370.28 v1(7599.5,4394.3)
  Layer 1 w3.5: H4.21@7150,3800 7599.5,4249.5 v1(7599.5,4394.3)
CSI_D1: H4.19 U2.45 | length 700.2
  Top Layer w3.5: U2.45 7567.01,4361.31 v1(7581.5,4375.8)
  Layer 1 w3.5: H4.19@7150,3900 7150,3902.25 7581.5,4333.75 v1(7581.5,4375.8)
CSI_D2: H4.17 U2.44 | length 551.8
  Top Layer w3.5: v1(7538.1,4357.7) 7538.1,4360.38 U2.44
  Layer 1 w3.5: H4.17@7150,4000 7190.3,4000 7507.59,4317.29 7507.59,4323.64 7515.86,4331.91 7522.21,4331.91 7538.1,4347.8 v1(7538.1,4357.7)
CSI_D3: H4.15 R16.1 U2.43 | length 1446
  Top Layer w3.5: v1(7434.2,3977.7) 7434.2,3836.5 7444.8,3825.9 7488.9,3825.9 7581.45,3733.35 7836.35,3733.35 R16.1 ; v1(7518.3,4378.5) v1@7519.33,4378.5 ; v1@7519.36,4378.46 U2.43
  Layer 1 w3.5: H4.15@7150,4100 7197.8,4100 7476.3,4378.5 v1(7518.3,4378.5)
  Layer 2 w3.5: H4.15@7150,4100 7156.5,4100 7278.8,3977.7 v1(7434.2,3977.7)
CSI_D4: H4.13 U2.42 | length 661.7
  Top Layer w3.5: U2.42 7577.86,4394.21 7600.84,4417.19 7602,4417.19 7602,4417.1 v1(7615.1,4417.1)
  Layer 1 w3.5: H4.13@7150,4200 7182.9,4232.9 7249.1,4232.9 7259.8,4243.6 7259.8,4262.8 7325.09,4328.09 7326.64,4328.09 7334.91,4336.36 7334.91,4337.91 7382.89,4385.89 7437.84,4385.89 7446.11,4394.16 7446.11,4401.31 7449.4,4404.6 7562.35,4404.6 7569.46,4397.49 7581.14,4397.49 7600.84,4417.19 7601.8,4417.19 7601.8,4417.1 v1(7615.1,4417.1)
CSI_D5: H4.11 U2.41 | length 512.6
  Top Layer w3.5: U2.41 7573.66,4409.96 v1(7575.3,4411.6)
  Layer 1 w3.5: H4.11@7150,4300 7261.6,4411.6 7261.75,4411.6 7264.86,4414.71 7276.54,4414.71 7279.65,4411.6 7331.95,4411.6 7333.06,4412.71 7344.74,4412.71 7345.85,4411.6 7423.65,4411.6 7426.16,4414.11 7437.84,4414.11 7440.35,4411.6 v1(7575.3,4411.6)
CSI_D6: H4.9 U2.40 | length 520.1
  Top Layer w3.5: U2.40 7594.21,4425.71 7596.7,4428.2 v1(7596.7,4431.3)
  Layer 1 w3.5: H4.9@7150,4400 7156.5,4400 7178.2,4421.71 7563.07,4421.71 7569.06,4427.69 7580.74,4427.69 7584.35,4431.3 v1(7596.7,4431.3)
CSI_D7: H4.7 U2.39 | length 491.9
  Top Layer w3.5: U2.39 7574.56,4441.46 v1(7574.9,4441.8)
  Layer 1 w3.5: H4.7@7150,4500 7218.21,4431.79 7563.26,4431.79 7573.27,4441.8 v1(7574.9,4441.8)
CSI_HSYNC: H5.17 U2.49 | length 667.2
  Top Layer w3.5: U2.49 7630,4353.53 7644.6,4368.13 v1(7644.6,4377)
  Layer 1 w3.5: v1(7644.6,4377) 7644.6,4276.7 7921.3,4000 H5.17@8050,4000
CSI_PCLK: H5.21 R9.2 U2.47 | length 831.7
  Top Layer w3.5: U2.47 7598.5,4358.2 v1(7614.2,4373.9)
  Layer 1 w3.5: v1(7614.2,4373.9) 7614.2,4192.85 7842.64,3964.41 7842.64,3950.96 7993.6,3800 H5.21@8050,3800
  other v1: 7843.3,3950.3
CSI_VSYNC: H5.19 U2.48 | length 759.2
  Top Layer w3.5: U2.48 7614.25,4353.53 7630.49,4369.77 7630.49,4393.31 v1(7628.5,4395.3)
  Layer 1 w3.5: v1(7628.5,4395.3) 7628.5,4282.9 8011.4,3900 H5.19@8050,3900
DA_MCLK: H4.3 U2.37 U7.9 | length 921.1
  Top Layer w3.5: U2.37 7575.45,4472.95 7577.5,4475 v1(7577.5,4477.8)
  Layer 1 w3.5: H4.3@7150,4700 7164,4686 7164,4672.25 7358.45,4477.8 v1(7577.5,4477.8)
  Bottom Layer w3.5: H4.3@7150,4700 7150,4860.7 7195.4,4906.1 7271.2,4906.1 7284.69,4919.59 U7.9
FMINL: U2.84
FMINR: U2.85
GND: C1.1 C2.2 C3.2 C5.2 C6.2 C7.2 C8.2 C9.2 C11.2 C12.2 C14.2 C15.2 C16.2 C17.1 C18.2 C19.2 C20.2 C23.2 C24.2 C25.2 C26.2 C27.2 C28.2 C29.2 C30.2 C31.2 C32.2 C33.2 C34.2 C35.2 H1.5 H1.6 H1.7 H1.8 H1.9 H2.3 H2.5 H2.6 H2.13 H2.14 H2.21 H2.22 H2.29 H2.36 H2.41 H2.42 H5.13 R3.1 R5.1 R8.1 R18.1 R19.1 R20.1 R22.1 U1.1 U1.4 U1.5 U1.12 U1.13 U1.15 U1.17 U1.21 U2.74 U2.80 U2.89 U3.1 U4.2 U5.6 U5.10 U5.11 U5.12 U5.13 U6.4 U7.6 U7.8 X1.2 X1.4 | length 1710.1
  Top Layer w3.5: H2.42 7151.4,4937.03 v1(7151.4,4936.7) ; U1.17 7241.69,4310.75 7252.67,4321.72 7252.67,4329.29 ; U1.1 7253.5,4263.5 U1.21 ; U1.15 7253.5,4326.5 U1.21 ; U1.13 U1.21 ; U1.12 7300.75,4310.75 U1.21 ; v1(7316.5,4238.9) U1.4 7300.75,4279.25 U1.21 ; v1(7434.5,4492.2) 7435,4491.7 C27.2 ; C26.2 7435.9,4445.9 v1(7436.4,4445.9) ; C34.2 7776.8,4765 v1(7777.5,4764.3) ; v1(7969.9,4716.1) 7970,4716 C19.2 ; v1(7972.8,4764.6) 7973.2,4765 C33.2
  Top Layer w7: C11.2 7228,4137 R5.1 7400,4132.3 v1(7395.3,4127.6) ; H2.36 7297.52,4842.02 v1(7314,4858.5) ; H2.29 7435.32,4847.82 v1(7435.4,4847.9) ; U3.1 7459.6,4070.4 v1(7459.6,4065.5) ; C31.2 7575,4230 C15.2 7580,4284 C7.2 7545.8,4318.2 v1(7545.8,4330.8) ; v1(7574.1,4860.8) 7573.11,4859.81 H2.22 7573.11,4769.89 R22.1 ; v1(7595.7,4859.4) 7592.8,4856.5 H2.21 7592.8,4793.7 7603.9,4782.6 7657.4,4782.6 C30.2 ; X1.4 7644.2,4235 v1(7658.6,4220.6) ; v1(7705.6,4302.3) 7706.2,4302.3 7723.5,4285 C1.1 ; X1.2 7729.92,4165 7754.92,4190 C24.2 ; H2.14 H2.13 7749.69,4821.97 7749.69,4847.31 v1(7749.1,4847.9) ; C35.2 v1(7877.5,4765) 7884,4771.5 7884,4798.61 7888.07,4802.68 H2.6 H2.5 ; v1(7884.5,4587.9) 7898.19,4574.21 7902.52,4574.21 7909.29,4567.44 U2.80 ; H2.5 v1(7907.8,4858) ; U2.74 7924.46,4473.12 7946.72,4473.12 v1(7947.1,4473.5) ; C16.2 C17.1 ; v1(7945.8,4860.9) 7946.46,4860.24 7946.46,4822.04 H2.3 ; R20.1 7970,4576.1 v1(7970.2,4575.9)
  Bottom Layer w3.5: v1(7225.1,4952.9) 7225.33,4952.9 U7.6 7225.63,4969.36 7240.7,4984.42 7253.84,4984.42 7265,4973.27 U7.8
  Bottom Layer w10: v1(7434.5,4492.2) 7434.5,4447.8 v1(7436.4,4445.9) ; v1(7705.6,4302.3) 7723.31,4284.59 U5.6
  other v1: 7586.3,3776.3 7612.5,3776.3 7638.7,3776.3 7585.9,3803.1 7612.1,3803.1 7638.3,3803.1 7362.3,3863 7389.4,3863.2 7362.3,3889.2 7389.4,3889.4 7362.3,3915.4 7389.4,3915.6 7466.4,3989.8 7492.6,3989.8 7518.8,3989.8 7782.3,4067.3 7754.9,4135.4 7683.5,4203.1 7419.7,4291.6 7746.46,4474.9 7766.04,4474.9 7785.62,4474.9 7805.2,4474.9 7613.4,4499.6 7803.1,4510.04 7612.6,4527 7803.1,4529.62 7803.1,4549.2 7612.8,4555.2 7704.9,4567.7 7724.48,4567.7 7744.06,4567.7 7802.8,4567.7 7704.9,4588 7724.48,4588 7744.06,4588 7802.8,4588 7392.4,4596.5 7364.9,4597 7419.1,4596.9 7704.6,4609 7724.18,4609 7743.76,4609 7763.34,4609 7782.92,4609 7802.5,4609
  other v3: 7732.36,4528.07
HOSCI: C7.1 U2.51 X1.1 | length 245.4
  Top Layer w3.5: X1.1 7640,4181.6 7676.2,4217.8 7676.2,4249.4 7669.6,4256 7654,4256 C7.1 7648.6,4285 7661.5,4297.9 U2.51
HOSCO: C1.2 U2.52 X1.3 | length 141.1
  Top Layer w3.5: U2.52 7677.24,4287.76 C1.2 7680,4255.5 7683.2,4252.3 7683.2,4242.4 7690.6,4235 X1.3
HPCOM: H5.2 U2.3 | length 286.3
  Top Layer w3.5: v1(7865.5,4692.5) 7866.5,4693.5 7866.5,4715.1 7866.22,4715.38 U2.3
  Layer 1 w3.5: v1(7865.5,4692.5) 7923,4750 H5.2
HPCOMFB: H5.1 U2.2 | length 258.3
  Top Layer w3.5: U2.2 7881.97,4732.14 7896.34,4746.51 8001.21,4746.51 8054.7,4800 H5.1
HPL: H5.4 U2.1 | length 231.3
  Top Layer w3.5: U2.1 7930,4720 7953.8,4696.2 7991.8,4696.2 8038,4650 H5.4
HPR: H5.6 U2.88 | length 281
  Top Layer w3.5: U2.88 7946.68,4693.43 7950.9,4689.2 7988.6,4689.2 8007.4,4670.4 8007.4,4592.1 8049.5,4550 H5.6
LCD_CLK: H2.30 H3.19 U2.26 | length 656.6
  Top Layer w3.5: H3.19 7336.49,4868.51 7403.24,4868.51 7415.63,4856.12 v1(7415.63,4820.83) ; U2.26 7574.82,4646.18 v1(7581.4,4639.6)
  Bottom Layer w3.5: v1(7415.63,4820.83) 7415.63,4779.72 7461.62,4733.73 7464.67,4733.73 7530.8,4667.6 7535.7,4667.6 7563.7,4639.6 v1(7581.4,4639.6)
LCD_D2: H2.23 H3.13 U2.6 | length 654.2
  Top Layer w3.5: H3.13 7553.43,4951.57 H2.23 ; v1(7815,4665) 7815,4675 7818.98,4678.98 U2.6
  Layer 2 w3.5: v1(7552.6,4811.3) 7552.6,4780.1 7565.6,4767.1 7734.1,4767.1 7802.09,4699.11 7805.84,4699.11 7814.11,4690.84 7814.11,4687.09 7815,4686.2 v1(7815,4665)
LCD_D3: H2.24 H3.14 U2.7 | length 641.8
  Top Layer w3.5: H3.14 7533.74,4921.26 H2.24@7533.74,4824.2 ; v1(7800,4685) 7803.23,4688.23 U2.7
  Layer 2 w3.5: v1(7532.4,4824.2) 7532.4,4778.1 7531.2,4776.9 7550,4758.1 7553.7,4758.1 7554.5,4757.3 7727.7,4757.3 v1(7800,4685)
LCD_D4: H2.25 H3.15 U2.8 | length 692.8
  Top Layer w3.5: H3.15 7514.06,4890.94 H2.25 ; v1(7785,4665) 7785,4689.95 7787.48,4692.43 U2.8
  Layer 2 w3.5: v1(7512.7,4812.2) 7512.7,4811.1 7514.3,4809.5 7514.3,4772.9 7536.1,4751.1 7550.8,4751.1 7559.3,4742.6 7722.5,4742.6 7765.99,4699.11 7775.84,4699.11 7784.11,4690.84 7784.11,4680.99 7785,4680.1 v1(7785,4665)
LCD_D5: H2.26 H3.16 U2.9 | length 680
  Top Layer w3.5: H3.16 7494.37,4860.63 H2.26@7494.37,4825.5 ; v1(7770,4685) 7771.73,4686.73 U2.9
  Layer 2 w3.5: v1(7493.8,4825.5) 7493.8,4765.4 7520.4,4738.8 7546.8,4738.8 7558.6,4727 7728,4727 v1(7770,4685)
LCD_D6: H2.27 H3.17 U2.10 | length 734.5
  Top Layer w3.5: H3.17 7385.6,4919.4 7404.4,4919.4 7474.69,4849.11 H2.27 ; v1(7755,4665) 7755.49,4665.49 7755.49,4719.51 U2.10
  Layer 2 w3.5: v1(7474.6,4810.4) 7474.6,4774.7 7517.5,4731.8 7543.9,4731.8 7557.2,4718.5 7725.2,4718.5 7744.59,4699.11 7745.84,4699.11 7754.11,4690.84 7754.11,4689.59 7755,4688.7 v1(7755,4665)
LCD_D7: H2.28 H3.18 U2.11 | length 736.7
  Top Layer w3.5: H3.18 7379.3,4875.7 7430,4875.7 7455.3,4850.4 7455,4850.1 H2.28@7455,4825.5 ; v1(7740,4685) 7740.24,4685.24 U2.11
  Layer 2 w3.5: v1(7454.5,4825.5) 7454.5,4777.4 7507.1,4724.8 7541,4724.8 7558.4,4707.4 7717.6,4707.4 v1(7740,4685)
LCD_D10: H2.15 H3.7 U2.12 | length 450.8
  Top Layer w3.5: H2.15 7710.91,4965.91 H3.7 ; U2.12 7724.49,4674.49 7725,4673.98 v1(7725,4665)
  Layer 1 w3.5: v1(7710.6,4819.5) 7710.6,4787.4 7725,4773 v1(7725,4665)
LCD_D11: H2.16 H3.8 U2.13 | length 387.8
  Top Layer w3.5: H2.16 7691.22,4996.22 H3.8 ; U2.13 7708.74,4686.26 v1(7710,4685)
  Layer 1 w3.5: v1(7690.7,4806.7) 7693.42,4803.98 7693.42,4781.18 7710,4764.6 v1(7710,4685)
LCD_D12: H2.17 H3.9 U2.14 | length 428.6
  Top Layer w3.5: H2.17 7671.54,5026.54 H3.9 ; U2.14 7692.99,4691.96 7694.11,4690.84 7694.11,4679.16 7692.99,4678.04 7692.99,4667.01 v1(7695,4665)
  Layer 1 w3.5: v1(7670.3,4816.6) 7670.3,4794.9 7687,4778.2 7687,4761.3 7695,4753.3 v1(7695,4665)
LCD_D13: H2.18 H3.10 U2.15 | length 386.3
  Top Layer w3.5: H3.10 7651.85,5003.15 H2.18 ; U2.15 7677.24,4687.76 v1(7680,4685)
  Layer 1 w3.5: v1(7651.6,4803.7) 7680,4775.3 v1(7680,4685)
LCD_D14: H2.19 H3.11 U2.16 | length 458.7
  Top Layer w3.5: H3.11 7632.17,4972.83 H2.19 ; U2.16 7661.5,4693.46 7664.11,4690.84 7664.11,4679.16 7661.5,4676.54 7661.5,4668.5 v1(7665,4665)
  Layer 1 w3.5: v1(7632.9,4819.5) 7632.9,4792.1 7665,4760 v1(7665,4665)
LCD_D15: H2.20 H3.12 U2.17 | length 422.6
  Top Layer w3.5: H3.12 7612.48,4942.52 H2.20 ; U2.17 7645.75,4685.75 7646.5,4685 v1(7650,4685)
  Layer 1 w3.5: v1(7613.4,4808.8) 7613.4,4791.2 7650,4754.6 v1(7650,4685)
LCD_D18: H2.7 H3.1 U2.18 | length 721.6
  Top Layer w3.5: v1@7630,4670 v1(7635,4665) 7635,4685 7630,4690 U2.18 ; H2.7 7868.39,4854.24 8013.46,4999.31 8044.31,4999.31 H3.1
  Bottom Layer w3.5: v1(7635,4665) 7635,4702.2 7650.2,4717.4 7825.3,4717.4 7863.39,4755.49 7863.39,4779.07 7868,4783.68 v1(7868,4811.1)
LCD_D19: H2.8 H3.2 U2.19 | length 658
  Top Layer w3.5: U2.19 7614.93,4719.33 7614.93,4686.27 v1(7615.6,4685.6) ; v1(7848.7,4821.9) 7848.7,4853.7 H3.2
  Bottom Layer w3.5: v1(7615.6,4685.6) 7615.6,4707.8 7632.2,4724.4 7818.3,4724.4 7848.7,4754.8 v1(7848.7,4821.9)
LCD_D20: H2.9 H3.3 U2.21 | length 633.4
  Top Layer w3.5: U2.21 7583.59,4719.16 7583.59,4686.41 v1(7585,4685) ; H2.9 7829.02,4884.02 H3.3
  Bottom Layer w3.5: v1(7585,4685) 7585,4689.8 7631.39,4736.19 7804.59,4736.19 7829.3,4760.9 v1(7829.3,4810.7)
LCD_D21: H2.10 H3.4 U2.23 | length 615.6
  Top Layer w3.5: v1(7540,4700) 7540,4693.86 U2.23 ; v1(7809.33,4821.38) 7809.33,4914.33 H3.4
  Bottom Layer w3.5: v1(7540,4700) 7585.3,4700 7628.49,4743.19 7786.99,4743.19 7809.33,4765.53 v1(7809.33,4821.38)
LCD_D22: H2.11 H3.5 U2.24 | length 757.9
  Top Layer w3.5: U2.24 7540.96,4678.21 7571.84,4678.21 7579.65,4670.4 7586.85,4670.4 7594.05,4663.2 v1(7597.9,4663.2) ; H2.11 7789.65,4944.65 H3.5
  Bottom Layer w3.5: v1(7597.9,4663.2) 7595.18,4665.92 7584.13,4665.92 7568.45,4681.6 7536.6,4681.6 7518.3,4699.9 7518.3,4714.1 7531.8,4727.6 7584.9,4727.6 7607.49,4750.19 7783.34,4750.19 7791.61,4758.46 7791.61,4805.79 v1(7790.2,4807.2)
LCD_D23: H2.12 H3.6 U2.25 | length 673.9
  Top Layer w3.5: U2.25 7541.27,4662.77 7564.47,4662.77 v1(7565.8,4664.1) ; v1(7769.96,4821.38) 7769.96,4974.96 H3.6
  Bottom Layer w3.5: v1(7565.8,4664.1) 7555.3,4674.6 7533.7,4674.6 7511.3,4697 7511.3,4717 7528.9,4734.6 7582,4734.6 7607.4,4760 7753.25,4760 7769.96,4776.71 v1(7769.96,4821.38)
LCD_DE: H2.34 H4.2 U2.27 | length 739.3
  Top Layer w3.5: U2.27 7570.61,4630.43 7575.56,4625.49 7587.24,4625.49 7590.79,4629.04 7602.24,4629.04 v1(7604.9,4631.7)
  Layer 1 w3.5: H4.2 7266.06,4750 v1(7336.89,4820.83)
  Bottom Layer w3.5: v1(7336.89,4820.83) 7336.89,4824.19 7358.9,4846.2 7384,4846.2 7397,4833.2 7397,4782.8 7548.1,4631.7 7569.35,4631.7 7575.56,4625.49 7587.24,4625.49 7593.45,4631.7 v1(7604.9,4631.7)
LCD_HSYNC: H2.32 H3.20 U2.28 | length 845.9
  Top Layer w3.5: H3.20 7125,5003.24 7107.94,5003.24 7104.87,5000.17 7104.87,4877.71 7107.94,4874.63 7320.47,4874.63 7336.6,4858.5 7368,4858.5 7376.26,4850.24 v1(7376.26,4820.83) ; U2.28 7581.69,4614.69 7581.9,4614.47 v1(7581.9,4611.3)
  Bottom Layer w3.5: v1(7376.26,4820.83) 7376.26,4776.54 7541.5,4611.3 v1(7581.9,4611.3)
LCD_VSYNC: H2.33 H4.1 U2.29 | length 719.7
  Top Layer w3.5: U2.29 7574.31,4598.94 7576.06,4597.19 7587.74,4597.19 7589.49,4598.94 7602.44,4598.94 v1(7605.9,4602.4)
  Layer 1 w3.5: H4.1 7137.6,4837.6 7349.5,4837.6 7352.5,4834.6 7352.5,4809.6 v1(7356.8,4805.3)
  Bottom Layer w3.5: v1(7356.8,4805.3) 7356.8,4782.2 7536.6,4602.4 7570.85,4602.4 7576.06,4597.19 7587.74,4597.19 7592.95,4602.4 v1(7605.9,4602.4)
LINEIN: H5.10 U2.86 | length 500.6
  Top Layer w3.5: v1(7868.7,4663.7) 7870.47,4661.93 U2.86
  Layer 1 w3.5: v1(7868.7,4663.7) 7868.7,4583.75 7886.64,4565.81 7894.54,4565.81 8013.25,4447.1 8013.25,4385.25 8048.5,4350 H5.10
LRADC: H5.14 U2.79 | length 566.4
  Top Layer w3.5: v1(7888.4,4551.7) U2.79
  Layer 1 w3.5: v1(7888.4,4551.7) 7924.49,4515.61 7934.84,4515.61 8005.1,4445.35 8005.1,4185 8040.1,4150 H5.14
MICIN: H5.8 U2.87 | length 379.2
  Top Layer w3.5: v1(7892.3,4677.2) 7892.78,4677.68 U2.87
  Layer 1 w3.5: v1(7892.3,4677.2) 7892.3,4600.05 8042.35,4450 H5.8
NetC4_2: C4.2 R1.1 R3.2 U1.14 | length 590.6
  Top Layer w5: C4.2 7260,4752.5 7252.5,4745 7250,4745 7236.6,4731.6 7206.8,4731.6 7195.2,4720 7195.2,4398.81 7218.03,4375.98 7257.17,4375.98 7269.25,4363.9 U1.14
  Top Layer w10: C4.2 7260.42,4754.58 7301.58,4754.58 R3.2 R1.1
NetC10_2: C10.2 R4.1 R5.2 U1.3 | length 462.1
  Top Layer w7: v1(7281.8,4215.6) 7281.8,4222.9 7285,4226.1 U1.3 ; 7288.65,4222.45 7304.6,4206.5 7376.5,4206.5 R5.2
  Top Layer w10: C10.2 7337.5,4400 v1(7338.9,4398.6)
  Bottom Layer w7: v1(7281.8,4215.6) 7282.7,4216.5 7282.7,4271.3 7291.27,4279.88 7291.27,4290.17 7338.9,4337.8 v1(7338.9,4398.6)
  Bottom Layer w10: v1(7338.9,4398.6) 7430.6,4398.6 v1(7432,4400)
NetC13_2: C13.2 R7.1 R8.2 U1.2 | length 380.5
  Top Layer w7: v1(7251.3,4209.8) 7252.67,4209.8 7269.25,4226.38 U1.2
  Top Layer w10: v1(7273,4490) R8.2
  Bottom Layer w10: v1(7251.3,4209.8) 7251.3,4216.2 7270.7,4235.6 v1(7270.7,4400.6) 7273,4402.9 v1(7273,4490)
NetD1_1: D1.1 L4.1 U4.1 | length 238.2
  Top Layer w3.5: v1(7818.2,4057.4) 7822.6,4057.4 L4.1 ; U4.1 7975,3977.24 D1.1
  Top Layer w10: v1(7934.3,4018) 7973,4018 D1.1
  Bottom Layer w10: v1(7818.2,4057.4) 7856.8,4018.8 7933.5,4018.8 v1(7934.3,4018)
NetL1_1: L1.1 U1.11 | length 308.4
  Top Layer w3.5: U1.11 7316.5,4344.22 7318.52,4342.2 v1(7320.8,4342.2)
  Bottom Layer w10: v1(7320.8,4342.2) 7320.8,4370.5 7320.9,4370.6 7320.9,4477.5 7386.4,4543 v1(7409,4543) 7452.1,4543 v1(7454,4544.9)
  other v1: 7321,4370.5 7428.8,4543.4
NetL2_1: L2.1 U1.6 | length 101.6
  Top Layer w7: U1.6 7416.5,4263.5 L2.1
NetL3_1: L3.1 U1.20 | length 421.5
  Bottom Layer w10: v1(7214.9,4257.6) 7233.2,4257.6 v1(7234.6,4259) 7235.4,4259.8 7236.4,4260.8 v1(7236.4,4640.5) 7234,4642.9 v1(7234,4658.5)
  other v1: 7234.2,4622
NetR16_2: R16.2 R17.2 U4.4 | length 103.9
  Top Layer w3.5: R16.2 R17.2 7891.57,3796.43 U4.4
PA0: H5.9 U2.66 | length 209.4
  Top Layer w3.5: v1(7889.7,4369.2) 7897.72,4361.18 U2.66
  Bottom Layer w3.5: v1(7889.7,4369.2) 7900.2,4379.7 8021.02,4379.7 8041.32,4400 H5.9@8050,4400
PA1: H5.7 U2.65 | length 294
  Top Layer w3.5: v1(7861.8,4386.7) 7875.59,4372.91 7875.59,4363.36 7881.97,4356.98 U2.65
  Bottom Layer w3.5: v1(7861.8,4386.7) 7936.7,4386.7 H5.7@8050,4500
PA2: H5.5 U2.64 | length 370.4
  Top Layer w3.5: v1(7861.48,4365.48) 7863.72,4365.48 7866.22,4367.98 U2.64
  Layer 2 w3.5: v1(7861.48,4365.48) 7880.5,4384.5 7899.3,4384.5 7916.2,4401.4 7916.2,4481.8 8034.4,4600 H5.5@8050,4600
PA3: H5.3 U2.63 | length 505
  Top Layer w3.5: v1(7839.1,4376.5) 7847.38,4368.22 7847.38,4359.64 7850.47,4356.54 U2.63
  Bottom Layer w3.5: v1(7839.1,4376.5) 7839.1,4387.84 7831.69,4395.25 7831.69,4406.94 7839.1,4414.35 7839.1,4562.45 7976.65,4700 H5.3@8050,4700
RESET: C5.1 H5.12 R2.2 U2.70 | length 1431
  Top Layer w3.5: v1(7788.7,4154.1) 7801.8,4167.2 7832.12,4167.2 7840.25,4175.33 7840.25,4201.3 7865.57,4226.62 7865.57,4229.12 7873.82,4237.37 C5.1 7877,4238.06 R2.2 ; v1(7888.4,4410) v1(7888.4,4410) U2.70
  Layer 2 w3.5: v1(7860.9,4472.9) 7861.3,4473.3 7891.95,4473.3 7903.31,4461.94 7903.31,4445.35 7888.4,4430.44 v1(7888.4,4410) ; v1(8026.6,4545.9) 8025.34,4544.64 8025.34,4531.79 7951.6,4458.05 7951.6,4399.1 7930.15,4377.65 7921.55,4377.65 7900.1,4356.2 7900.1,4339.55 7973.27,4266.38 8075.75,4266.38 8092.13,4250 H5.12
  Bottom Layer w3.5: v1(7788.7,4154.1) 7790.91,4156.31 7802.81,4156.31 7841.3,4194.8 7962.3,4194.8 7999.8,4232.3 7999.8,4254.05 8003.76,4258.01 8045.7,4258.01 8053.71,4250 H5.12 ; v1(7860.9,4472.9) 7860.9,4490.54 7855.19,4496.25 7855.19,4521.79 7860.1,4526.7 8005.3,4526.7 8024.5,4545.9 v1(8026.6,4545.9)
SDC0_CLK: H4.8 U2.56 U5.5 | length 1022.9
  Top Layer w3.5: U2.56 7740.24,4364.21 7737.59,4366.86 7737.59,4388.24 7741.6,4392.25 v1(7741.6,4396.1)
  Layer 2 w3.5: H4.8 7107.87,4450 7127.62,4430.25 7221.1,4430.25 7266.74,4384.61 7332.94,4384.61 7354.24,4363.31 7435.69,4363.31 7504.7,4294.3 7677.65,4294.3 7713.93,4330.58 7729.53,4330.58 7765.81,4366.86 7765.81,4378.54 7757.54,4386.81 7752.26,4386.81 7742.97,4396.1 v1(7741.6,4396.1)
  Bottom Layer w3.5: U5.5 7680,4311.3 7737.51,4368.81 7737.51,4378.46 7741.04,4381.99 7741.04,4395.54 v1(7741.6,4396.1)
SDC0_CMD: H4.10 R13.1 U2.55 U5.3 | length 1123.1
  Top Layer w3.5: v1(7668.8,4118.3) 7669.7,4118.3 R13.1 ; v1(7723.4,4376.4) 7724.49,4375.31 U2.55
  Layer 2 w3.5: H4.10 7217.89,4350 7224.2,4356.31 7432.79,4356.31 7668.8,4120.3 v1(7668.8,4118.3)
  Bottom Layer w3.5: v1(7668.8,4118.3) 7653.7,4118.3 7635.8,4136.2 7601.65,4136.2 7590.49,4147.36 7590.49,4159.04 7593.39,4161.94 U5.3 7593.39,4299.29 7623,4328.9 7670.3,4328.9 7688.4,4347 7701.7,4347 7715.5,4360.8 7715.5,4366.7 7723.4,4374.6 v1(7723.4,4376.4)
SDC0_D0: H4.6 R12.1 U2.57 U5.7 | length 1389.5
  Top Layer w3.5: R12.1 7655.1,4038.1 7684.25,4038.1 7686.3,4040.15 7686.3,4185.6 7714.7,4214 7747.84,4214 7750.92,4217.08 7750.92,4252.92 7745.74,4258.1 7745.74,4304.44 7755.98,4314.68 U2.57 v1@7755.98,4370.65
  Layer 2 w3.5: H4.6 7228.4,4550 7234.1,4544.3 7234.1,4508.95 7330.34,4412.71 7396.19,4412.71 7505.21,4303.69 7588.99,4303.69 7630,4344.7 7643.12,4344.7 7685.03,4386.61 7698.14,4386.61 7707.85,4376.9 7707.85,4372 7717.56,4362.29 7729.24,4362.29 7737.59,4370.64 7749.64,4370.64 v1(7751.7,4372.7)
  Bottom Layer w3.5: 7760,4368 7760,4271.61 U5.7
SDC0_D1: H4.4 R11.1 U2.58 U5.8 | length 1402.3
  Top Layer w3.5: R11.1 7693.3,4031.3 7693.3,4178.6 7721.7,4207 7750.74,4207 7757.92,4214.18 7757.92,4255.82 7752.74,4261 7752.74,4301.54 7762.98,4311.78 7767.28,4311.78 7771.73,4316.23 U2.58 7771.73,4360.82 7767.69,4364.86 7767.69,4391.49 v1(7767.7,4396.7)
  Layer 1 w3.5: H4.4 7166.4,4650 7349.39,4467.01 7464.96,4467.01 7468.27,4463.69 7583.84,4463.69 7593.55,4473.4 7718.5,4473.4 7767.7,4424.2 v1(7767.7,4396.7)
  Bottom Layer w3.5: v1(7767.7,4396.7) 7767.69,4364.86 7770.3,4362.25 7770.3,4348.3 7809.92,4308.68 U5.8
SDC0_D2: H4.14 R15.1 U2.53 U5.1 | length 1009.1
  Top Layer w3.5: R15.1 7580.9,4118.9 v1(7580.9,4121.1) ; v1(7692.3,4372.5) 7692.99,4371.81 U2.53
  Layer 1 w3.5: v1(7420.8,4048.6) 7493.3,4121.1 v1(7580.9,4121.1)
  Layer 2 w3.5: H4.14 7319.4,4150 v1(7420.8,4048.6)
  Bottom Layer w3.5: v1(7580.9,4121.1) 7506.77,4195.23 7506.77,4282.72 7540.75,4316.69 7551.64,4316.69 7577.85,4342.9 7664.5,4342.9 7692.3,4370.7 v1(7692.3,4372.5)
SDC0_D3: H4.12 R14.1 U2.54 U5.2 | length 1146
  Top Layer w3.5: v1(7622.2,4117.6) 7622.6,4118 R14.1 ; v1(7706.8,4398) 7708.74,4396.06 U2.54
  Layer 2 w3.5: H4.12 7107.87,4250 7127.62,4269.75 7207.1,4269.75 7265.44,4328.09 7326.64,4328.09 7331.86,4333.31 7406.49,4333.31 7426.2,4313.6 7426.2,4311.65 7620.25,4117.6 v1(7622.2,4117.6)
  Bottom Layer w3.5: v1(7622.2,4117.6) 7607,4117.6 7550.08,4174.52 U5.2 7550.08,4289.08 7596.9,4335.9 7667.4,4335.9 7685.5,4354 7698.8,4354 7706.5,4361.7 7706.5,4397.7 v1(7706.8,4398)
SPI0_CLK: H4.16 U2.59 U6.6 | length 1005.7
  Top Layer w3.5: v1(7781.8,4370.7) 7787.48,4365.02 U2.59
  Bottom Layer w3.5: H4.16 7330.5,4050 v1(7331.5,4051) 7379.5,4099 7673.45,4099 7792.15,4217.7 7821.9,4217.7 7831.3,4227.1 7831.3,4321.2 v1(7781.8,4370.7)
SPI0_CS: H4.18 R23.2 U2.60 U6.1 | length 1918.8
  Top Layer w3.5: H4.18 7197.6,3950 7305.6,3842 7305.6,3737.5 7292.1,3724 7251.6,3724 7230,3745.6 U6.1 ; v1(7797.2,4404.8) 7797.2,4402.1 7796.69,4401.6 7796.69,4365.06 7803.23,4358.52 U2.60
  Layer 2 w3.5: H4.18 7475.33,3950 7546.53,3878.8 7563.7,3878.8 7652,3967.1 7652,4032 7726,4106 v1(7951.9,4106) 7813,4244.9 7813,4255.6 7796.69,4271.91 7796.69,4401.6 7797.2,4402.1 v1(7797.2,4404.8)
SPI0_MISO: H4.20 U2.61 U6.2 | length 1690
  Top Layer w3.5: H4.20 7249.6,3850 7280,3819.6 U6.2 ; v1(7810.8,4370.9) 7812,4370.9 7818.98,4363.92 U2.61
  Layer 2 w3.5: H4.20 7107.87,3850 7127.62,3830.25 7308.62,3830.25 7312.19,3826.68 7564.98,3826.68 7611.5,3873.2 7611.5,3916.7 7674.35,3979.55 7674.35,4020.65 7741.31,4087.61 7968.31,4087.61 7989.31,4108.61 7989.31,4153.89 7945.2,4198 7930.8,4198 7815.1,4313.7 7815.1,4354.9 7813.21,4356.79 7813.21,4368.49 v1(7810.8,4370.9)
SPI0_MOSI: H4.22 U2.62 U6.5 | length 1316.9
  Top Layer w3.5: v1(7816.2,4393.7) 7819.8,4393.7 7823.36,4390.14 7823.36,4378.29 7824.91,4376.74 7824.91,4370.74 7834.72,4360.92 U2.62
  Bottom Layer w3.5: H4.22 7162.5,3750 7244.6,3832.1 7244.6,3909.3 7274.6,3939.3 7332.7,3939.3 7380.1,3986.7 7380,3986.8 v1(7380,4060) 7412,4092 7676.35,4092 7795.05,4210.7 7824.8,4210.7 7832.7,4218.6 7862.2,4218.6 7875.2,4231.6 7875.2,4298.6 7824.91,4348.89 7824.91,4376.74 7817.5,4384.15 7817.5,4392.4 v1(7816.2,4393.7)
SVREF: C22.2 C23.1 R21.1 R22.2 U2.33 | length 507.3
  Top Layer w3.5: v1(7436.1,4779.2) 7436.1,4759.9 C22.2 ; U2.33 7577.54,4535.94 v1(7577.9,4536.3)
  Top Layer w10: C23.1 C22.2 7441.5,4754.5 7483.5,4754.5 R21.1 7520,4753 R22.2
  Layer 2 w3.5: v1(7436.1,4779.2) 7436.1,4708.2 7577.9,4566.4 v1(7577.9,4536.3)
TP_INT: U7.7
TPX1: H2.37 U7.2 | length 125.1
  Top Layer w3.5: H2.37 7277.83,4855.83 7282,4860 v1(7282.9,4860)
  Bottom Layer w3.5: v1(7282.9,4860) 7284.69,4858.21 U7.2
TPX2: H2.39 U7.4 | length 120.3
  Top Layer w3.5: v1(7237.9,4857.6) 7238.46,4857.04 H2.39
  Bottom Layer w3.5: v1(7237.9,4857.6) 7245.32,4850.18 U7.4
TPY1: H2.38 U7.3 | length 121.6
  Top Layer w3.5: H2.38 7258.15,4855.05 v1(7261.6,4858.5)
  Bottom Layer w3.5: v1(7261.6,4858.5) 7265,4855.1 U7.3
TPY2: H2.40 U7.5 | length 56.4
  Top Layer w3.5: v1(7211.3,4820.1) 7218.05,4820.1 H2.40
  Bottom Layer w3.5: v1(7211.3,4820.1) 7225.63,4805.77 U7.5
TV_OUT: H5.18 U2.72 | length 725
  Top Layer w3.5: v1(7869,4444.4) 7871.05,4442.35 7871.05,4441.46 U2.72
  Layer 2 w3.5: v1(7869,4444.4) 7830.31,4405.71 7830.31,4387.86 7824.99,4382.54 7824.99,4342.11 7999,4168.1 7999,4088.4 v1(7988.9,4078.3)
  Bottom Layer w3.5: v1(7988.9,4078.3) 7988.9,4004.6 8043.5,3950 H5.18
TV_VRN: C21.2 C25.1 U2.75 | length 418.1
  Top Layer w3.5: C25.1 7807,4254 7807,4266 C21.2 7853.19,4312.19 7904.49,4312.19 7927.95,4335.65 7931.8,4331.8 v1(7931.8,4330) ; v1(7888.9,4488.7) U2.75
  Layer 1 w3.5: v1(7888.9,4488.7) 7945.91,4431.69 7945.91,4348.14 7937,4339.24 7937,4339.04 7931.8,4333.84 v1(7931.8,4330)
TV_VRP: C21.1 C24.1 U2.76 | length 455.8
  Top Layer w3.5: C24.1 7798.7,4254.7 7798.7,4266.3 C21.1 ; v1(7869.3,4504.2) 7869.55,4504.45 U2.76
  Layer 1 w3.5: v1(7775.6,4221.1) 7775.6,4356.95 7767.69,4364.86 7767.69,4376.54 7775.96,4384.81 7780.96,4384.81 7783.09,4386.94 7783.09,4401.26 7777.3,4407.05 7777.3,4412.2 v1(7869.3,4504.2)
TVIN0: U2.78
TVIN1: U2.77
USB_DM: H1.2 H5.22 U2.68 | length 1407.3
  Top Layer w3.5: H1.2 7574.5,3896.5 7583.4,3905.4 7583.4,3915.3 7591.62,3923.52 7708.28,3923.52 7713.1,3928.35 v1(7713.1,3938.4) ; v1(7845.8,4401.1) 7846.09,4400.81 7867.74,4400.81 7879.66,4388.89 7889.96,4388.89 7896.01,4382.84 7905.29,4382.84 7909.66,4378.46 U2.68
  Layer 1 w3.5: v1(7816.12,4149.68) 7826.18,4149.68 7899.42,4222.92 7899.42,4330.32 7894.59,4335.16 7894.59,4352.64 7899.42,4357.48 7898.7,4358.25 7895.54,4355.09 7883.86,4355.09 7875.59,4363.36 7875.59,4375.04 7878.75,4378.2 7875.91,4381.04 7875.91,4392.54 7867.64,4400.81 7856.14,4400.81 7855.85,4401.1 v1(7845.8,4401.1)
  Bottom Layer w3.5: v1(7816.12,4149.68) 7816.12,4139.62 7746.4,4069.9 7746.4,3962.9 7721.9,3938.4 v1(7713.1,3938.4) 7711.65,3936.95 7711.65,3926.9 7706.99,3922.24 7706.99,3913.54 7718.25,3902.29 7774.34,3902.29 7791.16,3919.11 7923.08,3919.11 7962.62,3879.57 7962.62,3839.29 8005.4,3796.5 8011.2,3796.5 8013.25,3794.45 8013.25,3787.47 8050.72,3750 H5.22
USB_DP: H1.3 H5.20 U2.69 | length 1375.5
  Top Layer w3.5: H1.3 7600,3894.6 7590.4,3904.2 7590.4,3912.4 7594.52,3916.52 7711.18,3916.52 7718.05,3923.4 v1(7728.1,3923.4) ; v1(7860.8,4416.1) 7861.27,4416.1 7869.56,4407.81 7870.64,4407.81 7882.56,4395.89 7892.86,4395.89 7898.91,4389.84 7905.29,4389.84 7909.66,4394.21 U2.69
  Layer 1 w3.5: v1(7831.13,4134.67) 7831.13,4144.73 7906.42,4220.02 7906.42,4333.22 7901.59,4338.06 7901.59,4349.74 7906.42,4354.58 7906.42,4360.42 7903.65,4363.2 7903.81,4363.36 7903.81,4375.04 7895.54,4383.31 7883.86,4383.31 7883.7,4383.15 7882.91,4383.94 7882.91,4395.44 7870.54,4407.81 7860.8,4407.81 v1(7860.8,4416.1)
  Bottom Layer w3.5: v1(7831.13,4134.67) 7821.07,4134.67 7753.4,4067 7753.4,3959.6 7728.1,3934.3 v1(7728.1,3923.4) 7726.65,3921.95 7716.6,3921.95 7713.99,3919.34 7713.99,3916.44 7721.15,3909.29 7771.44,3909.29 7788.26,3926.11 7925.98,3926.11 7969.62,3882.47 7969.62,3842.19 8008.3,3803.5 8011.2,3803.5 8013.25,3805.55 8013.25,3812.53 8050.72,3850 H5.20
USB_ID: H1.4 R6.2 R9.1 | length 292.4
  Top Layer w3.5: H1.4 7625.5,3838.8 v1(7627.2,3837.1) ; v1(7797,3905) R9.1
  Bottom Layer w3.5: v1(7627.2,3837.1) 7634.3,3830 7722,3830 v1(7797,3905)
VCC-TV: C28.1 C29.1 R10.2 U2.73 | length 398.1
  Top Layer w3.5: v1(7889.2,4456.1) 7890.3,4457.2 U2.73 ; C29.1 C28.1 7929.25,4203.25 7935.25,4203.25 R10.2
  Layer 1 w3.5: v1(7889.2,4456.1) 7916,4429.3 7916,4375.9 7915.7,4375.6 v1(7915.7,4343.9)
  Bottom Layer w3.5: v1(7915.7,4343.9) 7915.7,4324.2 7970.7,4269.2 v1(7970.7,4239.4)
VLED+: C16.1 D1.2 H2.2 U4.5 | length 1170.2
  Top Layer w3.5: v1(7930.6,4073.5) 7930.6,4055.6 D1.2 7895,4016.06 7911.2,3999.86 7911.2,3880.1 7930.94,3860.35 U4.5 7935,3846.46 C16.1 ; H2.2 7966.81,4817.29 7968.2,4815.9 v1(7968.2,4814.9)
  Layer 1 w3.5: v1(7930.6,4073.5) 7930.6,4137 7952.91,4159.31 7952.91,4447.74 7844.39,4556.26 7844.39,4701.24 7899.86,4756.71 7909.91,4756.71 7968.1,4814.9 v1(7968.2,4814.9)
  Layer 2 w3.5: v1(7930.6,4073.5) v1@7931.1,4073.5
VLED-: H2.1 R18.2 U4.3 | length 1126.1
  Top Layer w3.5: U4.3 7894.5,3975.49 v1(7894.5,3975.9) ; R18.2@7915.25,4068.25 7915.25,4083.05 7921.95,4089.75 7965.17,4089.75 7975.2,4099.78 v1(7975.2,4134.6) ; H2.1 7986.5,4814.2 v1(7989.5,4811.2)
  Layer 1 w3.5: v1(7975.2,4134.6) 7975.2,4135.15 7984.9,4144.85 7984.9,4181.4 7984.81,4181.31 7984.81,4455.74 7931.94,4508.61 7911.54,4508.61 7851.39,4568.76 7851.39,4698.34 7902.76,4749.71 7912.81,4749.71 7920.1,4757 7935.3,4757 v1(7989.5,4811.2)
  Bottom Layer w3.5: v1(7894.5,3975.9) 7934.5,3975.9 7959,4000.4 7959,4038.4 7949.4,4048 7919,4048 v1(7907,4060)
VRA1: C18.1 R19.2 U2.81 | length 177.8
  Top Layer w3.5: U2.81 7939.06,4583.19 7950.82,4571.42 7950.82,4501.68 7970,4482.5 C18.1 R19.2
VRA2: C19.1 R20.2 U2.83 | length 95.2
  Top Layer w3.5: U2.83 7924.36,4614.75 7961.75,4614.75 R20.2 C19.1
pads on no net: H2.35 U5.9
copper on no net:
  other v2: 7790.24,3851.61

## Polygon pours and split planes (outlines as drawn)
GND on Top Layer "GND_L01_P000" (solid, pour order 0): 7051.8,5078.5 7051.8,3715 8148.6,3715 8148.6,5078.5
GND on Bottom Layer "GND_L04_P006" (solid, pour order 6): 7051.8,5078.5 7051.8,3715 8148.6,3715 8148.6,5078.5
GND on Layer 2 "GND_L03_P007" (solid, pour order 7): 7051.8,5078.5 7051.8,3715 8148.6,3715 8148.6,5078.5
GND on Layer 1 "GND_L02_P008" (solid, pour order 8): 7051.8,5078.5 7051.8,3715 8148.6,3715 8148.6,5078.5

## Other copper
Top Layer:
  rectangle net 5V: 7215.7,4276.7 7243.6,4297.4
  rectangle net 5V: 7327.1,4276.6 7355.4,4329.3

## Silkscreen, mask and mechanical layers (free items; w line width, h text height)
Mechanical 1:
  the board outline again, w10

## Text inside footprints (layer, text, board x,y; h text height)
H2: Top Overlay "1" at 8022.5,4821.38 h30 r180
U5: Bottom Overlay "TF CARD" at 7746.47,4065.36 h39.37; Bottom Overlay "KINMOX" at 7714.47,3965.36 h39.37